# Altium PCB MC0101S_V0.90A.pcbdoc
Units mm, origin at the board's own origin, x right, y up, seen from the top; angles counter-clockwise.
Board outline 73 x 50 mm, 4 copper layers (Top Layer, Mid-Layer 1, Mid-Layer 2, Bottom Layer); 152 components, 91 nets, 419 pads, 252 vias.
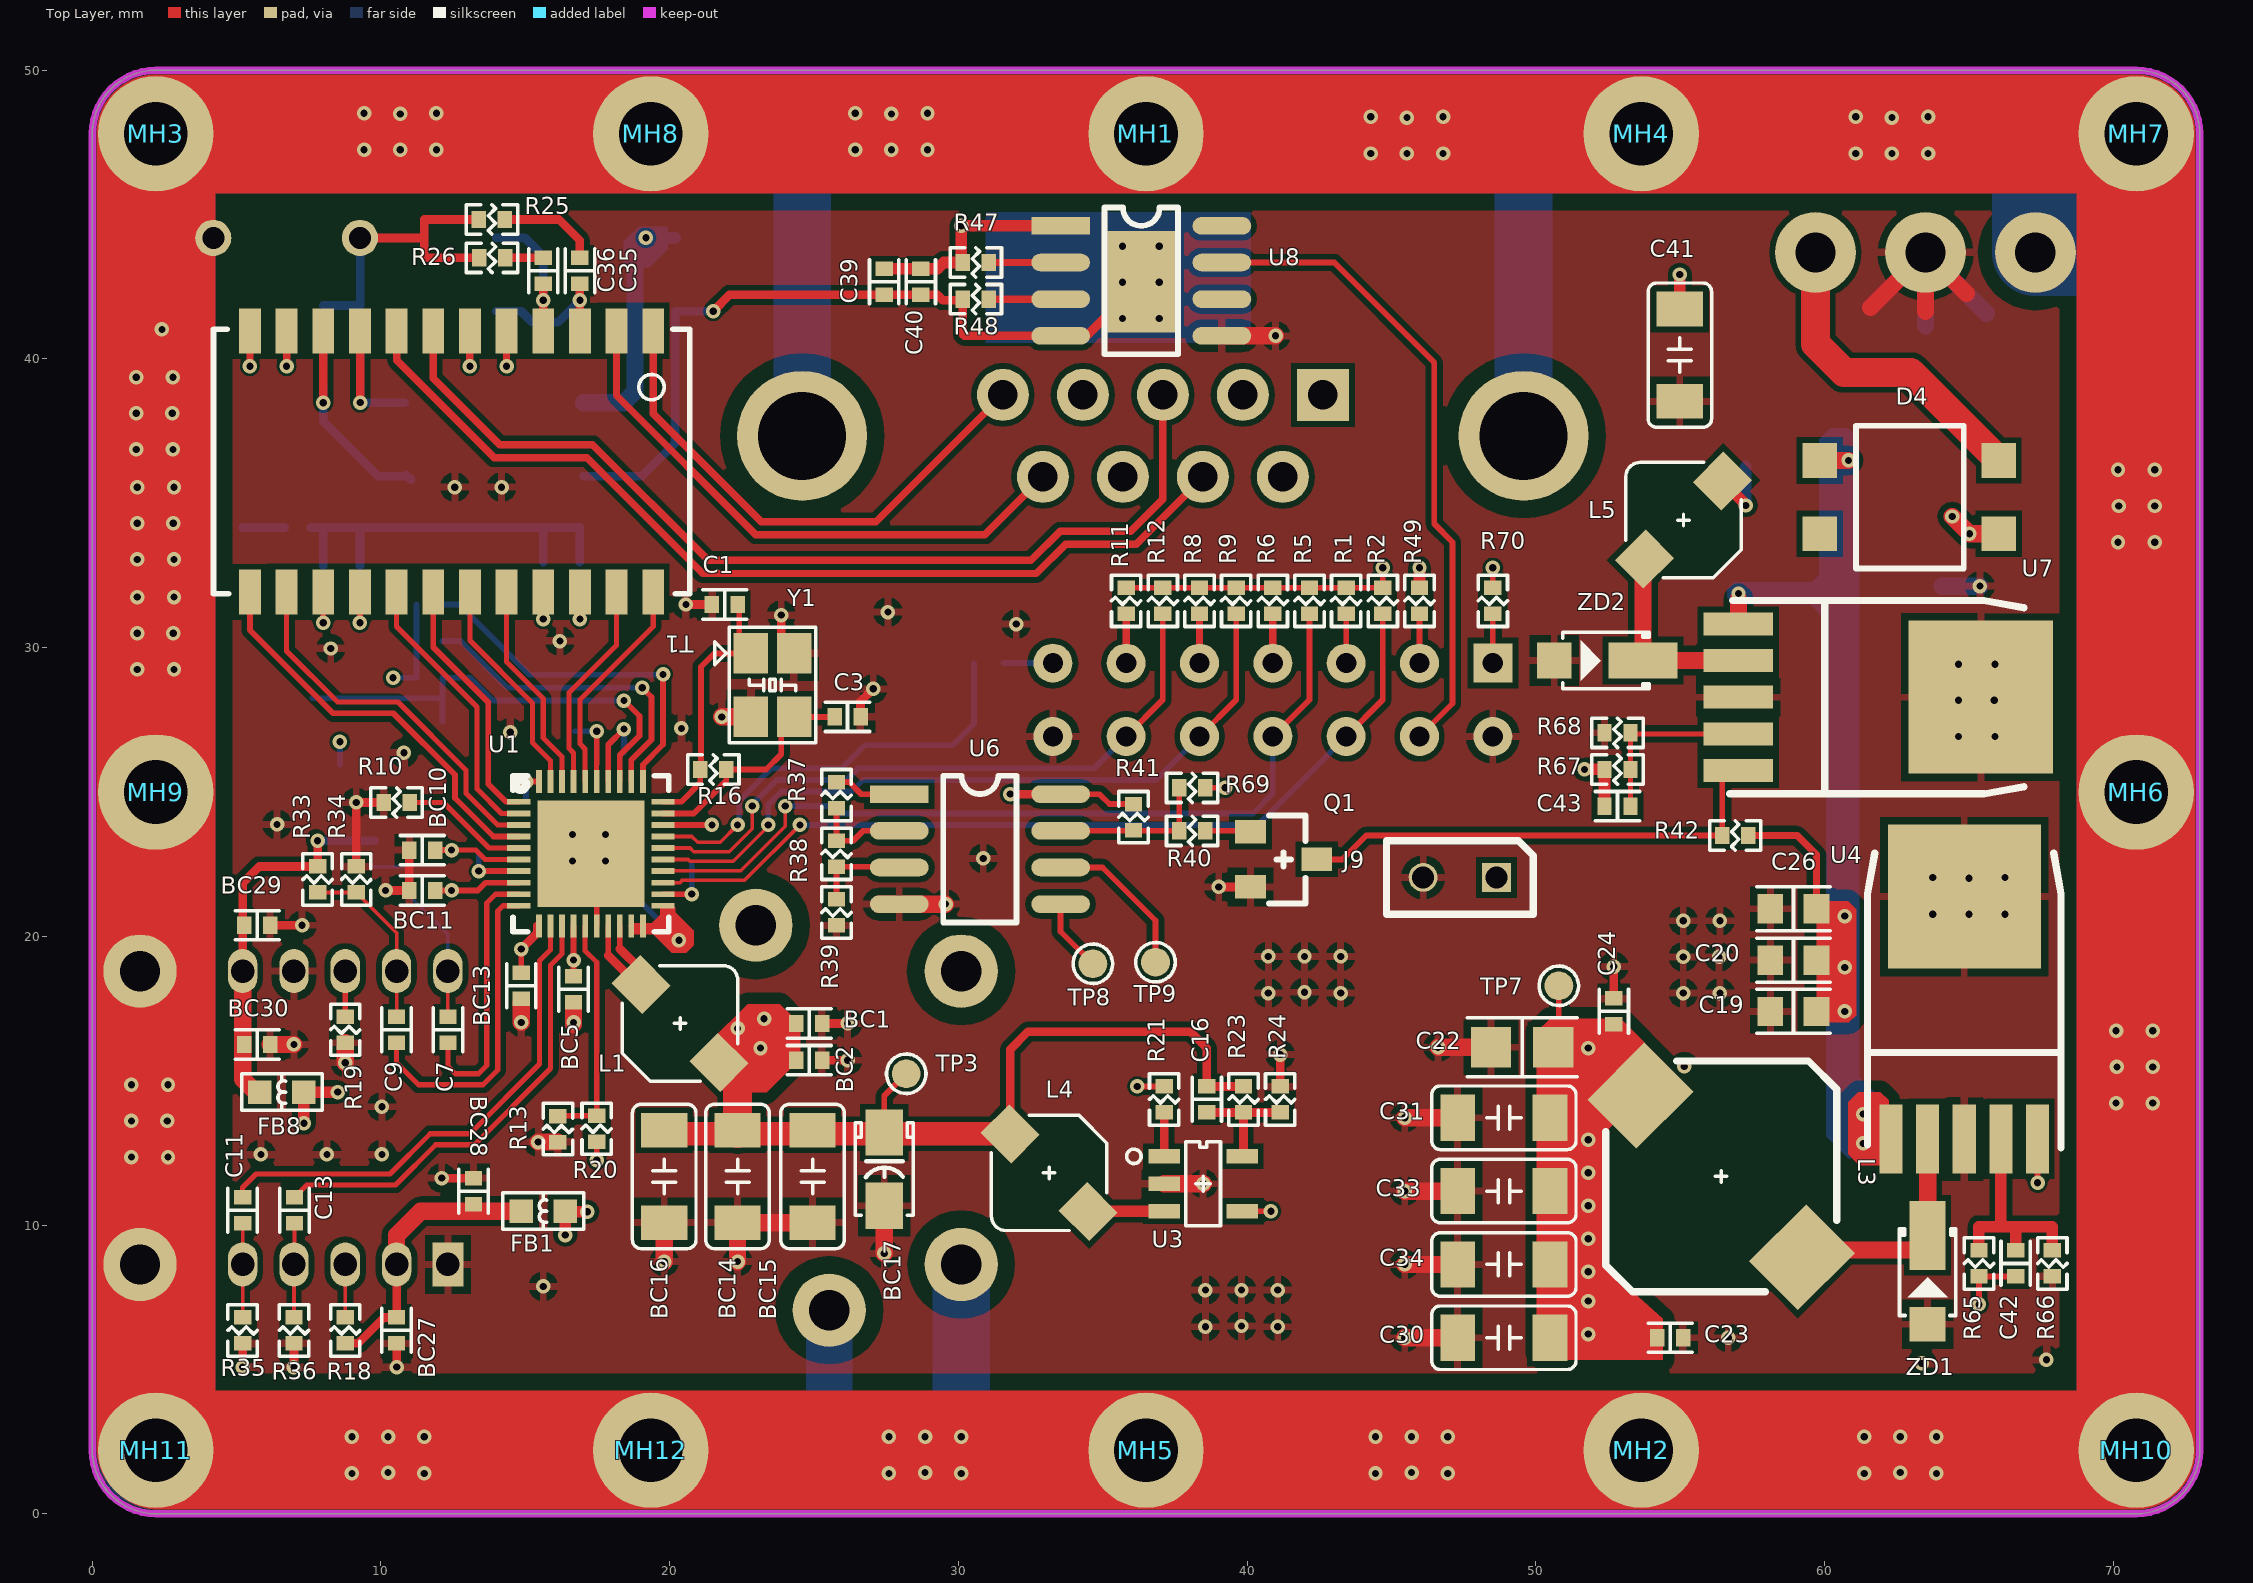
[diagram p0: Top Layer view]
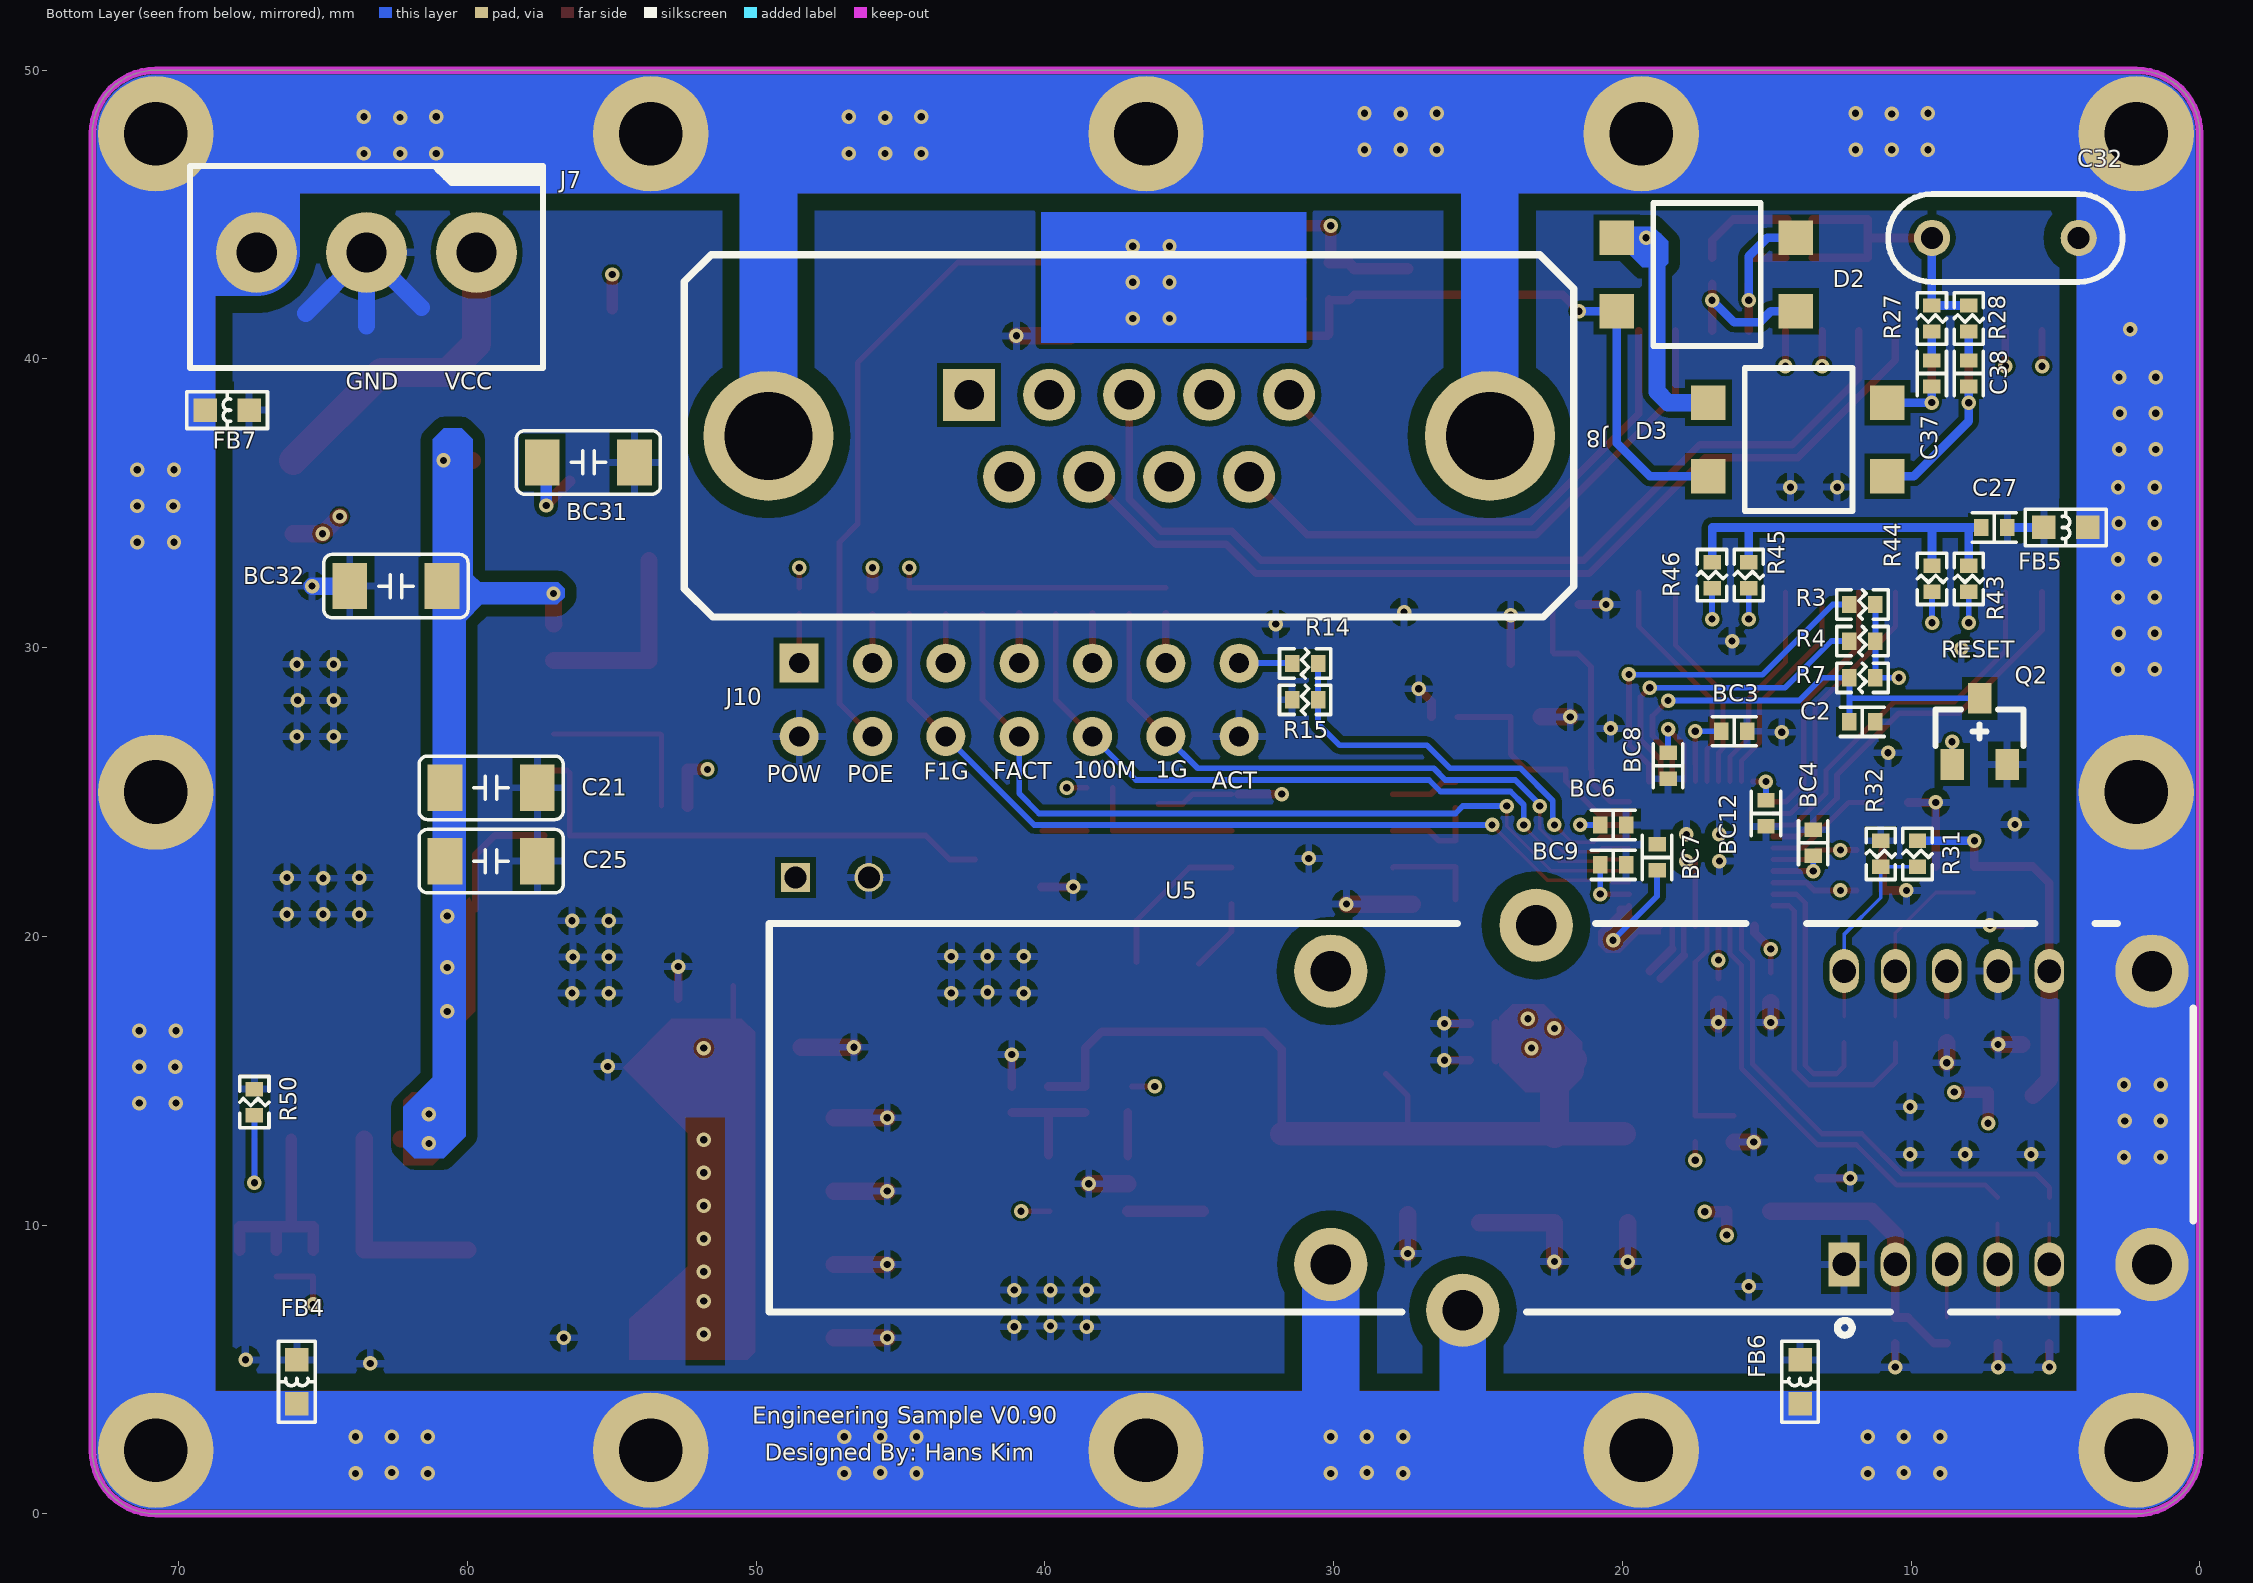
[diagram p1: Bottom Layer view, seen from below]
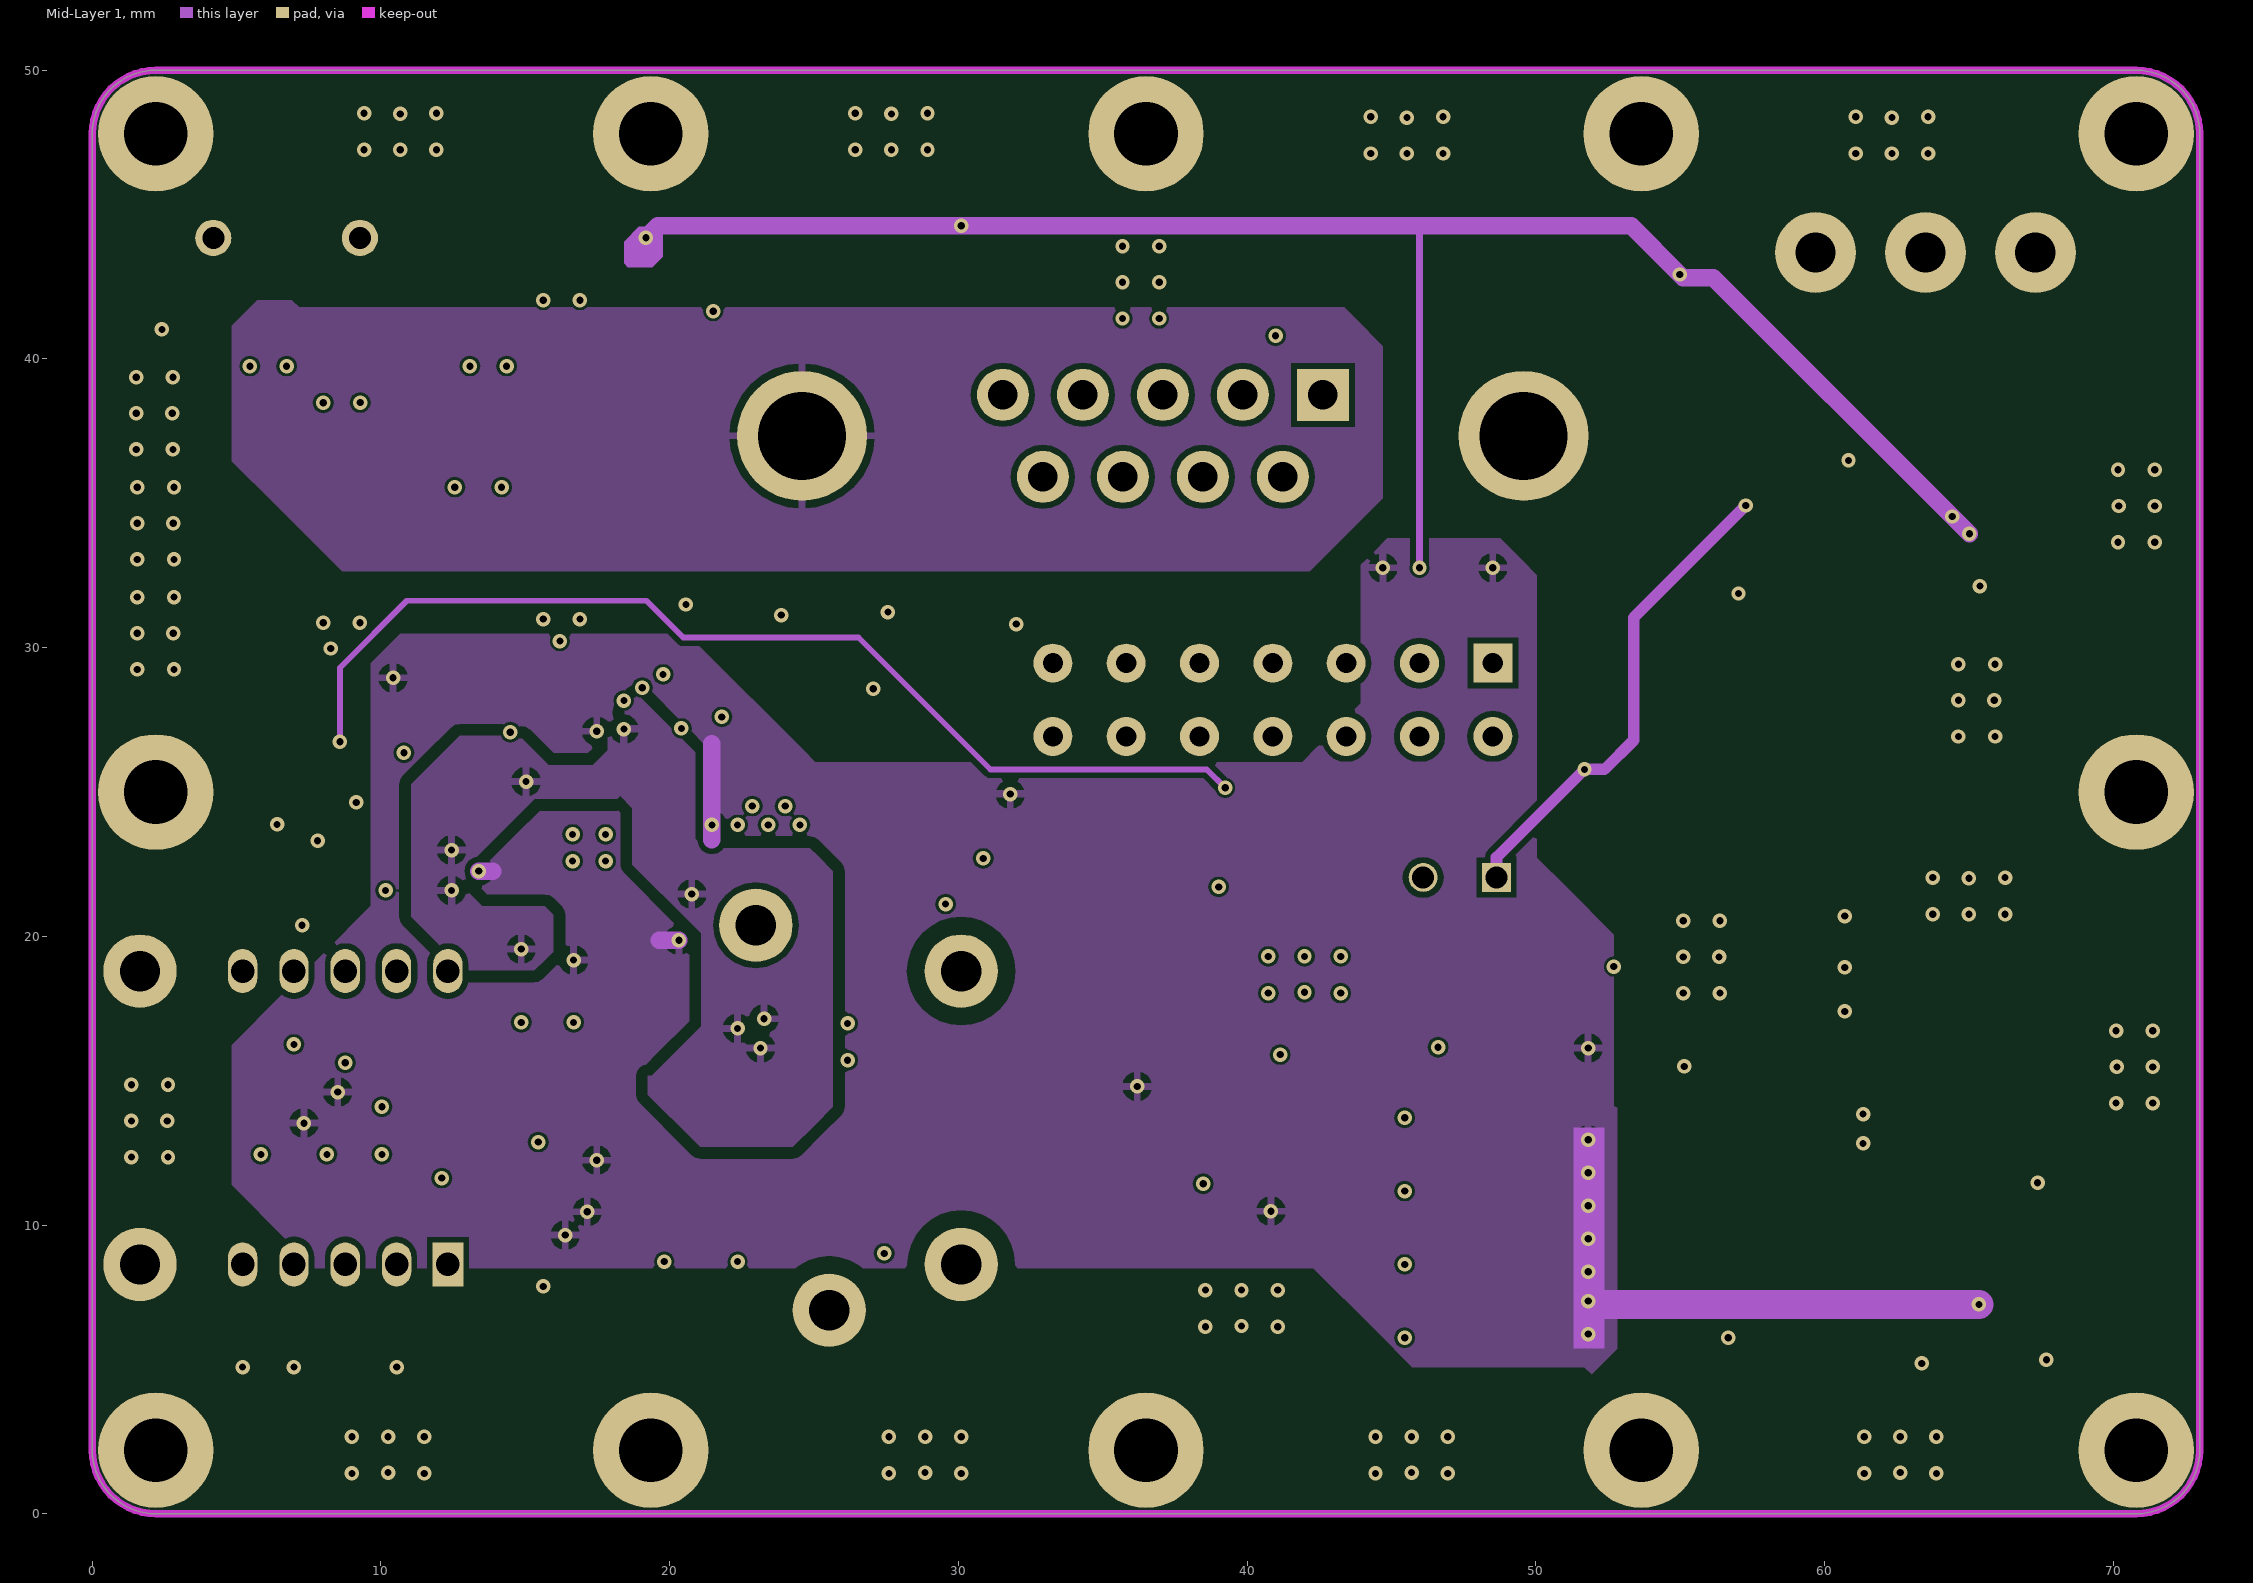
[diagram p2: Mid-Layer 1]
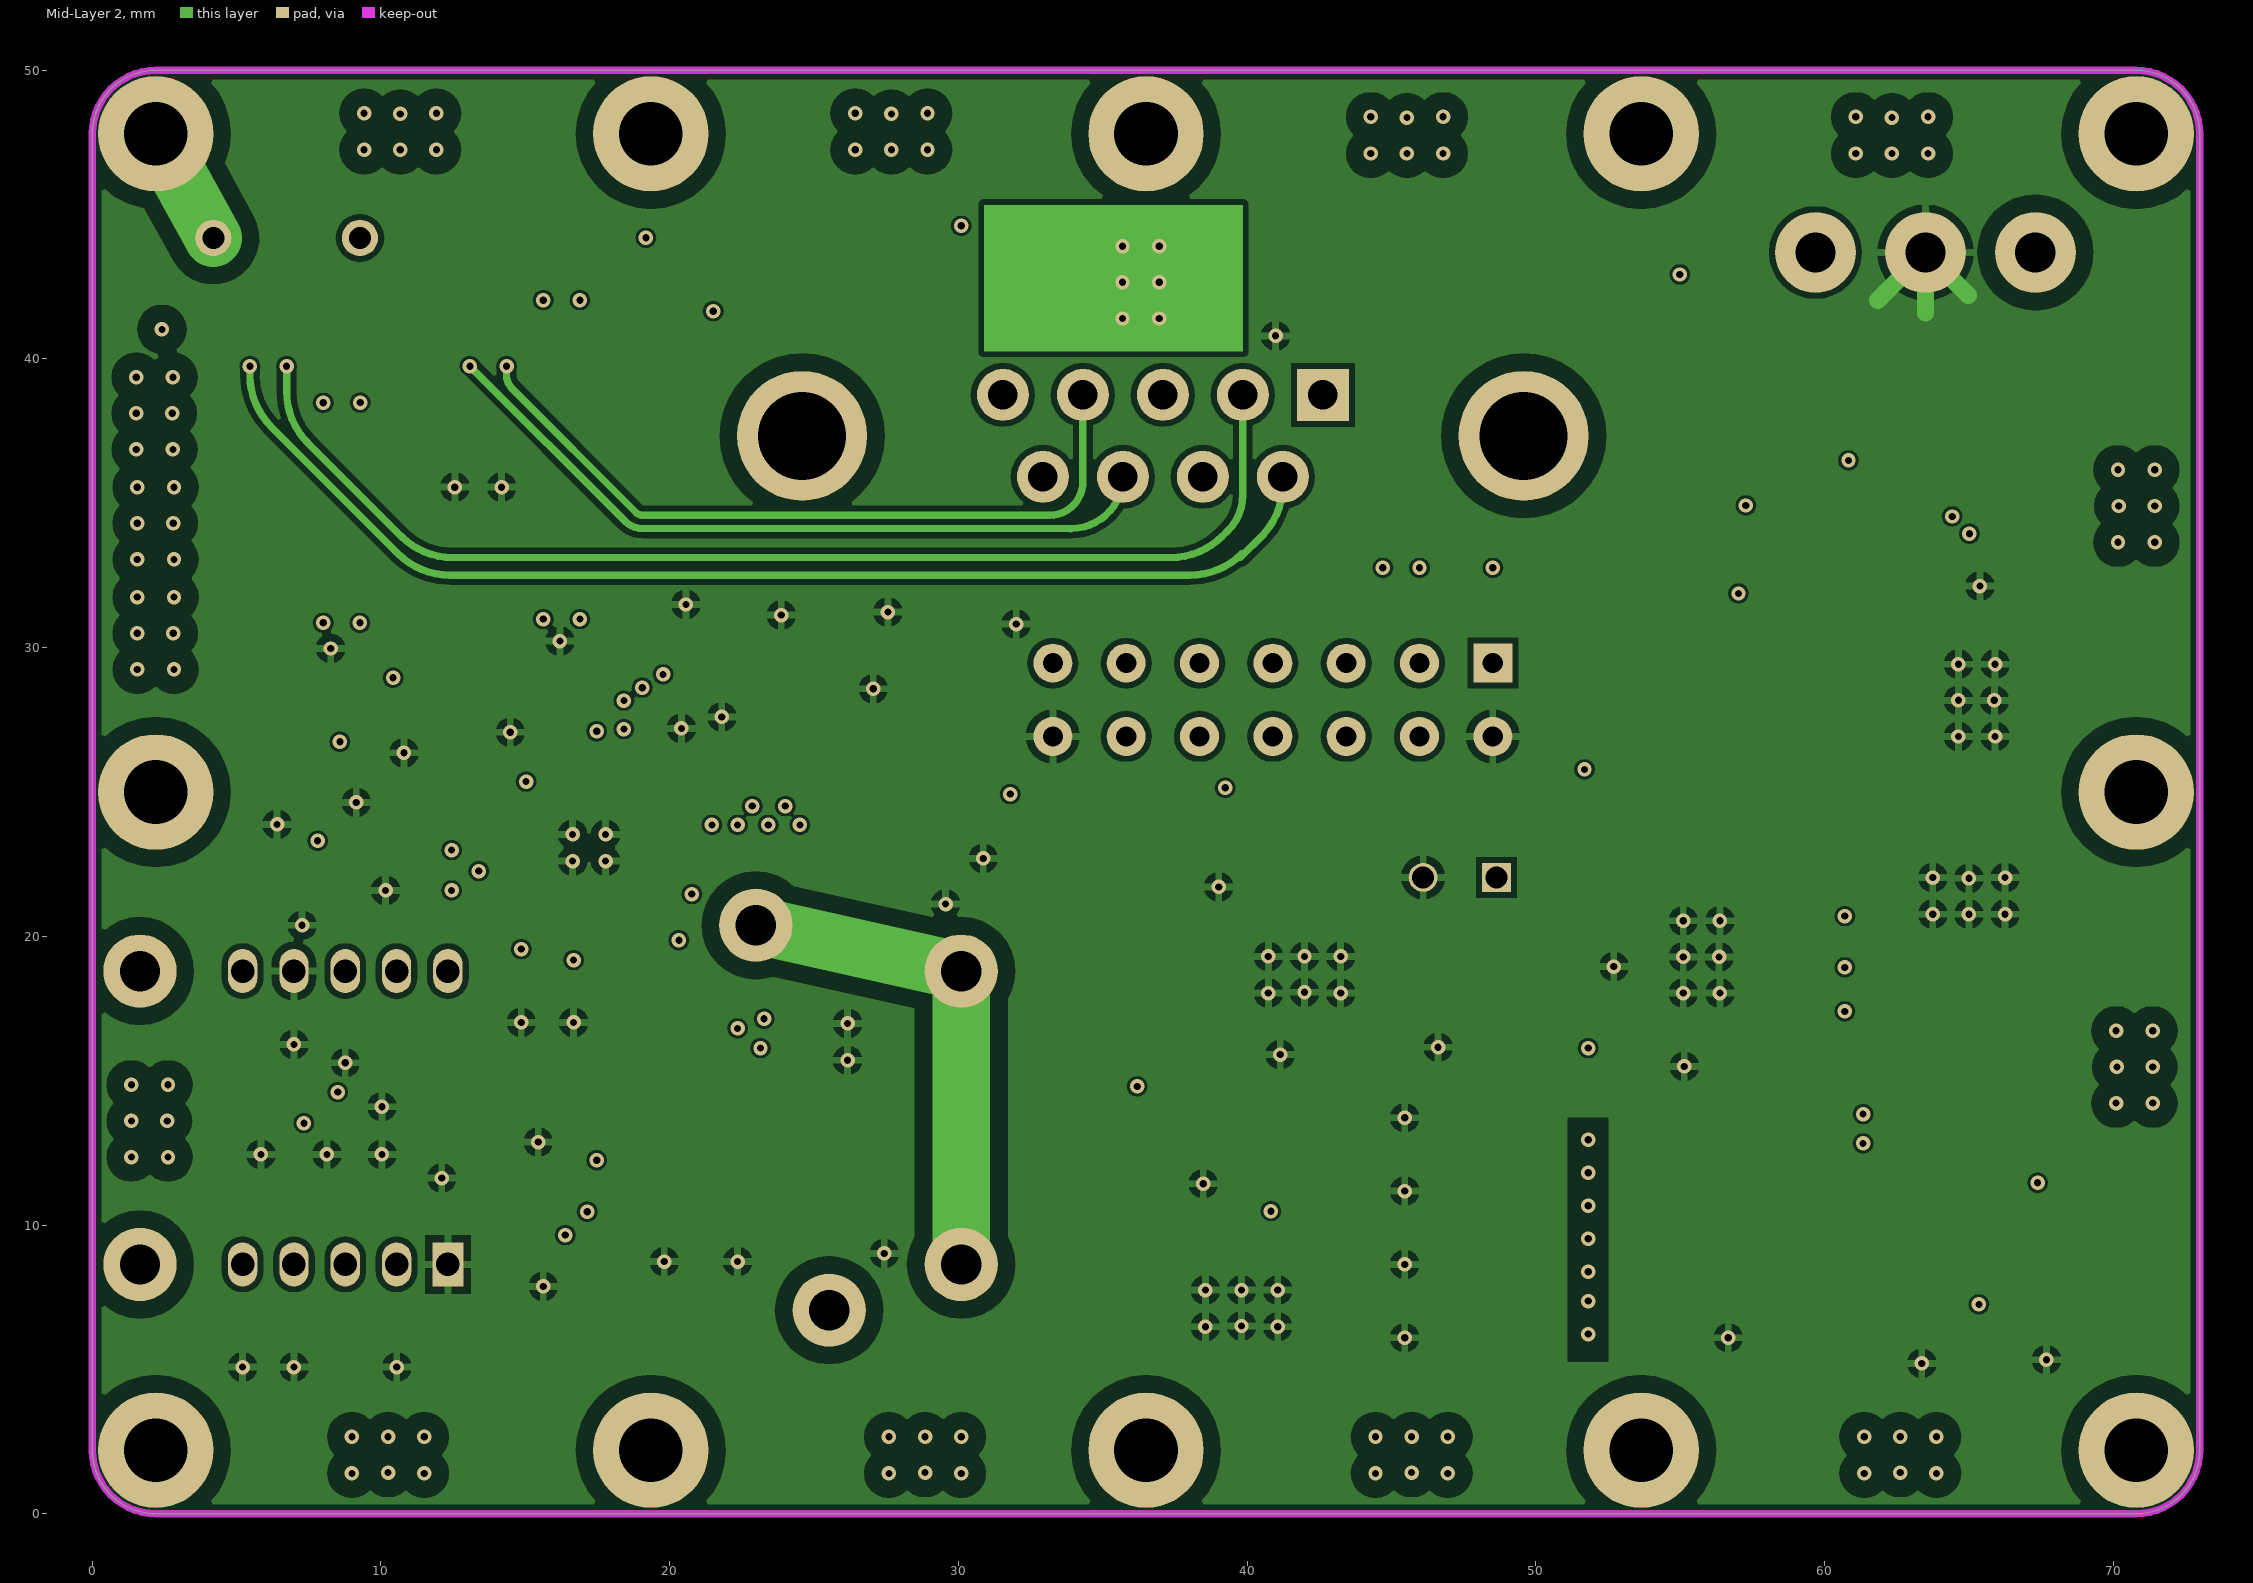
[diagram p3: Mid-Layer 2]

## Layer stack, top to bottom
Top Solder: solder mask 0.0102, Solder Resist, Dk 3.5
Top Layer: signal copper 0.0356
Dielectric1: dielectric 0.32, FR-4, Dk 4.8
Mid-Layer 1: signal copper 0.0356
Dielectric2: dielectric 0.32, FR-4, Dk 4.8
Mid-Layer 2: signal copper 0.0356
Dielectric3: dielectric 0.32, FR-4, Dk 4.8
Bottom Layer: signal copper 0.0356
Bottom Solder: solder mask 0.0102, Solder Resist, Dk 3.5

## Board outline
0,2.2 ccw(c2.2,2.2) 2.2,0 70.8,0 ccw(c70.8,2.2) 73,2.2 73,47.8 ccw(c70.8,47.8) 70.8,50 2.2,50 ccw(c2.2,47.8) 0,47.8

## Design rules (kind name [scope] priority, off if disabled: settings)
Clearance Clearance_5 [InNet('AGND') vs ((InNet('GND') and isRegion)  or InNet('+3.3V'))] p1: gap=0.6
Clearance Clearance_4 [isRegion vs IsRegion] p2: gap=0.4
Clearance Clearance_3 [InNet('AGND') vs (OnLayer('Keep-Out Layer'))] p3: gap=0
Clearance Clearance_2 [InNetClass('ETH') vs InNetClass('ETH')] p4: gap=0.127
Clearance Clearance_1 [isVia] p5: gap=0.1
Clearance [All] p6: gap=0.2
ComponentClearance ComponentClearance_1 [InComponent('FB6') or InComponent('CN2') vs InComponent('U5') or InComponent('J4')] p1: gap=0 collisioncheckmode=3 verticalgap=0 showdistances=FALSE
ComponentClearance [All] p2: gap=0.1 collisioncheckmode=3 verticalgap=0.1 showdistances=FALSE
HoleSize [All] p1: absolutevalues=TRUE maxlimit=5.12 minlimit=0.025 maxpercent=80.000 minpercent=20.000
MinimumSolderMaskSliver MinimumSolderMaskSliver_2 [isVia vs isVia] p1: minsoldermaskwidth=0.1
MinimumSolderMaskSliver MinimumSolderMaskSliver_1 [IsPad vs isPad] p2: minsoldermaskwidth=0.05
MinimumSolderMaskSliver [All] p3: minsoldermaskwidth=0.1
PolygonConnect [All] p1: connectstyle=Relief reliefconductorwidth=0.254 reliefentries=4 polygonreliefangle="90 Angle" airgapwidth=0.254
RoutingVias [All] p1: holewidth=0.25 width=0.5 viastyle="Through Hole" minholewidth=0.25 minwidth=0.5 maxholewidth=0.25 maxwidth=0.5
SilkToSilkClearance [All] p1: silktosilkclearance=0.01
SilkToSolderMaskClearance [IsPad] p1: minsilkscreentomaskgap=0 clearancetoexposedcopper=TRUE
SolderMaskExpansion [All] p1: expansion=0.102
Width Width_2 [InNet('AGND')] p1: maxlimit=5 minlimit=0.254 preferedwidth=2.2
Width Width_1 [InNetClass('ETH')] p2: maxlimit=0.2 minlimit=0.127 preferedwidth=0.178
Width [All] p3: maxlimit=1 minlimit=0.127 preferedwidth=0.2
24 further rules are at their usual default settings.

## Components (designator, comment, footprint, x,y, rotation, side; value= is the part's Value field where it differs from the comment)
BC1 "1uF" CS-1005 24.83,16.983 r0 top
BC2 "0.1uF" CS-1005 24.83,15.713 r0 top
BC3 "0.1uF" CS-1005 16.129,27.105 r180 bottom
BC4 "0.1uF" CS-1005 13.389,23.241 r90 bottom
BC5 "0.1uF" CS-1005 16.672,18.161 r270 top
BC6 "0.1uF" CS-1005 20.32,23.86 r180 bottom
BC7 "0.1uF" CS-1005 18.796,22.733 r90 bottom
BC8 "0.1uF" CS-1005 18.415,25.908 r270 bottom
BC9 "0.1uF" CS-1005 20.32,22.479 r180 bottom
BC10 "0.1uF" CS-1005 11.43,22.987 r180 top
BC11 "0.1uF" CS-1005 11.43,21.59 r180 top
BC12 "0.1uF" CS-1005 15.027,24.257 r270 bottom
BC13 "0.1uF" CS-1005 14.859,18.288 r270 top
BC14 "47uF" CS-3216 22.352,11.684 r270 top
BC15 "47uF" CS-3216 24.95,11.684 r270 top
BC16 "47uF" CS-3216 19.812,11.684 r270 top
BC17 "22uF" CTS-3216 27.432,11.938 r270 top
BC27 "0.1uF" CS-1005 10.541,6.35 r90 top
BC28 "1uF" CS-1005 13.208,11.176 r270 top
BC29 "0.1uF" CS-1005 5.715,20.383 r180 top
BC30 "1uF" CS-1005 5.715,16.256 r180 top
BC31 "1uF" CS-3216 55.818,36.417 r180 bottom
BC32 "4.7uF/100V" CS-3216 62.484,32.131 r0 bottom
C1 "12pF" CS-1005 21.911,31.496 r180 top
C2 "0.1uF" CS-1005 11.684,27.432 r180 bottom
C3 "12pF" CS-1005 26.162,27.602 r0 top
C7 "0.1uF" CS-1005 12.319,16.764 r270 top
C9 "0.1uF" CS-1005 10.541,16.764 r270 top
C11 "0.1uF" CS-1005 5.207,10.515 r90 top
C13 "0.1uF" CS-1005 7.005,10.515 r90 top
C16 "22pF" CS-1005 38.608,14.351 r90 top
C19 "0.1uF" CS-1608 58.928,17.399 r180 top
C20 "1nF" CS-1608 58.928,19.177 r180 top
C21 "4.7uF/100V" CS-3216 59.182,25.146 r180 bottom
C22 "10uF" CS-2012 49.53,16.158 r180 top
C23 "0.1uF" CS-1005 54.653,6.096 r0 top
C24 "10nF" CS-1005 52.705,17.399 r90 top
C25 "4.7uF/100V" CS-3216 59.182,22.604 r180 bottom
C26 "0.1uF" CS-1608 58.928,20.955 r180 top
C27 "0.1uF" CS-1005 7.112,34.163 r0 bottom
C30 "22uF" CS-3216 48.895,6.096 r180 top
C31 "22uF" CS-3216 48.895,13.716 r180 top
C32 "1nF/2KV" CIP-5.0 6.731,44.192 r180 bottom
C33 "22uF" CS-3216 48.895,11.176 r180 top
C34 "22uF" CS-3216 48.895,8.636 r180 top
C35 "10nF" CS-1005 16.891,43.053 r270 top
C36 "10nF" CS-1005 15.621,43.053 r270 top
C37 "10nF" CS-1005 9.281,39.497 r270 bottom
C38 "10nF" CS-1005 8.001,39.497 r270 bottom
C39 "10nF" CS-1005 27.432,42.672 r90 top
C40 "0.1uF" CS-1005 28.702,42.672 r90 top
C41 "4.7uF/100V" CS-3216 54.991,40.132 r270 top
C42 "33nF" CS-1005 66.623,8.67 r90 top
C43 "33nF" CS-1005 52.832,24.511 r0 top
D2 "MB6S" MB2S 17.164,42.926 r90 bottom
D3 "MB6S" MB2S 13.991,37.211 r90 bottom
D4 "MB6S" MB2S 62.865,35.214 r90 top
FB1 "600" LS-1608 15.621,10.483 r180 top
FB4 "600" LS-1608 65.913,4.572 r270 bottom
FB5 "600" LS-1608 4.641,34.163 r180 bottom
FB6 "600" LS-1608 13.843,4.572 r270 bottom
FB7 "600" LS-1608 68.326,38.227 r0 bottom
FB8 "600" LS-1608 6.569,14.605 r180 top
J7 "KF2EDGR-3.81-3P" KF2EDGV-3.81-3P 59.69,43.688 r0 bottom
J8 "D-SUB_ST_PCB-MALE" D-SUB_ST_PCB-MALE 37.084,37.338 r180 bottom
J9 "CON 2P" Header_2.54_2p 48.641,22.041 r180 top
J10 "CON 14P DUAL" HEADER_2.54_7X2 40.894,28.194 r0 bottom
L1 "2.2uH//NI" CDRH3D16NP 20.359,16.983 r270 top
L3 "CDRH8D38NP-101NC" CDRH8D38 56.426,11.684 r90 top
L4 "2.2uH" CDRH3D16NP 33.147,11.811 r90 top
L5 "CDRH3D16NP-4R7N" CDRH3D16NP 55.118,34.417 r0 top
MH1 "4.04pi" VA-2.2 36.5,47.8 r0 top locked
MH2 "4.04pi" VA-2.2 53.65,2.2 r0 top locked
MH3 "4.04pi" VA-2.2 2.2,47.8 r0 top locked
MH4 "4.04pi" VA-2.2 53.65,47.8 r0 top locked
MH5 "4.04pi" VA-2.2 36.5,2.2 r0 top locked
MH6 "4.04pi" VA-2.2 70.8,25 r0 top locked
MH7 "4.04pi" VA-2.2 70.8,47.8 r0 top locked
MH8 "4.04pi" VA-2.2 19.35,47.8 r0 top locked
MH9 "4.04pi" VA-2.2 2.2,25 r0 top locked
MH10 "4.04pi" VA-2.2 70.8,2.2 r0 top locked
MH11 "4.04pi" VA-2.2 2.2,2.2 r0 top locked
MH12 "4.04pi" VA-2.2 19.35,2.2 r0 top locked
Q1 "MMBT6427/SOT-23" SOT-23 41.275,22.66 r0 top
Q2 "MMBT6427/SOT-23" SOT-23 7.62,27.105 r90 bottom
R1 "470" RS-1005 43.434,31.623 r270 top
R2 "4.7K" RS-1005 44.704,31.623 r270 top
R3 "4.7K" RS-1005 11.684,31.496 r0 bottom
R4 "4.7K" RS-1005 11.684,30.226 r0 bottom
R5 "4.7K" RS-1005 42.164,31.623 r270 top
R6 "470" RS-1005 40.894,31.623 r270 top
R7 "4.7K" RS-1005 11.684,28.956 r0 bottom
R8 "470" RS-1005 38.354,31.623 r270 top
R9 "4.7K" RS-1005 39.624,31.623 r270 top
R10 "2.5K_F" RS-1005 10.541,24.638 r0 top
R11 "470" RS-1005 35.814,31.623 r270 top
R12 "4.7K" RS-1005 37.084,31.623 r270 top
R13 "4.7K//NI" RS-1005 17.472,13.335 r90 top
R14 "470" RS-1005 30.988,29.452 r0 bottom
R15 "4.7K" RS-1005 30.988,28.194 r0 bottom
R16 "10M" RS-1005 21.513,25.781 r0 top
R18 "10K" RS-1005 8.763,6.35 r270 top
R19 "1K" RS-1005 8.763,16.764 r90 top
R20 "0" RS-1005 16.129,13.323 r270 top
R21 "1K" RS-1005 37.131,14.351 r270 top
R23 "40.2K" RS-1005 39.878,14.351 r270 top
R24 "45.3" RS-1005 41.148,14.351 r90 top
R25 "75" RS-1005 13.843,44.831 r0 top
R26 "75" RS-1005 13.848,43.503 r0 top
R27 "75" RS-1005 9.281,41.402 r270 bottom
R28 "75" RS-1005 8.001,41.402 r270 bottom
R31 "10K" RS-1005 9.779,22.86 r90 bottom
R32 "10K" RS-1005 11.049,22.86 r270 bottom
R33 "10K" RS-1005 7.805,21.971 r90 top
R34 "10K" RS-1005 9.144,21.971 r270 top
R35 "10K" RS-1005 5.207,6.35 r90 top
R36 "10K" RS-1005 6.985,6.35 r90 top
R37 "10K" RS-1005 25.781,24.892 r270 top
R38 "8.56" RS-1005 25.781,22.86 r270 top
R39 "8.56K" RS-1005 25.781,20.828 r270 top
R40 "1K" RS-1005 38.1,23.656 r0 top
R41 "10K" RS-1005 36.068,24.13 r270 top
R42 "100K" RS-1005 56.91,23.495 r180 top
R43 "75" RS-1005 8.001,32.385 r270 bottom
R44 "75" RS-1005 9.271,32.385 r270 bottom
R45 "75" RS-1005 15.621,32.512 r270 bottom
R46 "75" RS-1005 16.891,32.512 r270 bottom
R47 "24.9" RS-1005 30.607,43.341 r180 top
R48 "63.4" RS-1005 30.607,42.071 r180 top
R49 "4.7K" RS-1005 45.974,31.623 r90 top
R50 "0" RS-1005 67.385,14.258 r270 bottom
R65 "10K_1%" RS-1005 65.353,8.67 r270 top
R66 "6K_1%" RS-1005 67.893,8.67 r90 top
R67 "10K_1%" RS-1005 52.832,25.781 r180 top
R68 "1.5K_1%" RS-1005 52.832,27.051 r0 top
R69 "1K" RS-1005 38.1,25.146 r0 top
R70 "4.7K" RS-1005 48.514,31.623 r90 top
T1 "HY2424S-LF" HY2424S-LF 12.446,36.449 r180 top
TP3 "1V" TP-SMD(1.0) 28.194,15.24 r0 top
TP7 "TP" TP-SMD(1.0) 50.8,18.288 r90 top
TP8 "VTEMP" TP-SMD(1.0) 34.659,19.05 r90 top
TP9 "TRIG_H" TP-SMD(1.0) 36.83,19.104 r90 top
U1 "RTL8213B" QFN-40_5X5 17.272,22.86 r270 top
U3 "AME5253-AEVADJ" SOT-23-5P 38.481,11.43 r270 top
U4 "XL7015E1" TO252-5L 64.845,17.179 r0 top
U5 "FTLF1319F1MTL" FTLF1319F1MTL 12.319,13.716 r180 bottom
U6 "LM56" SOIC-8 30.734,22.987 r270 top
U7 "XL7015E1" TO252-5L 61.214,28.284 r270 top
U8 "TPS2379DDAR" SOIC-8E 36.322,42.672 r270 top
Y1 "25MHz-S20P-SX32" SX-32 23.563,28.702 r90 top
ZD1 "DFLS140" PowerDI123 63.575,8.416 r270 top
ZD2 "DFLS140" PowerDI123 52.489,29.554 r180 top

## Footprints (in the part's own frame and the unit in brackets; to place one, negate y for a bottom-side part, rotate by r counter-clockwise, add the part's x,y. Pads: shape width x height; smd on the part's side, far side on the other; paste and mask are expansions set on the pad)
CDRH3D16NP [mm]
  rect 1.5x1.4 smd rot 45: 1(1.35,1.35) 2(-1.35,-1.35)
  Top Layer pour cut-out: -1.973,1.727 -2,-0.7 -0.7,-2 1.025,-2 2,-1.025 2,0.7 0.7,2 -1.7,2
  silkscreen extent -2,-2 2,2
CDRH8D38 [mm]
  rect 2.4x2.8 smd rot 45: 1(-2.8,-2.8) 2(2.8,2.8)
  Top Layer pour cut-out: -3.075,4 -4,3.075 -4,-2.3 -2.3,-4 3.025,-4 4,-3.025 4,2.025 2.025,4
  silkscreen extent -4,-4 4,4
CIP-5.0 [mil]
  round 49.37 hole 30: 1(-100,0) 2(100,0)
  silkscreen extent -160,-60 160,60
CS-1005 [mm]
  rect 0.5x0.6 smd: 1(-0.45,0) 2(0.45,0)
  silkscreen extent -0.76,-0.51 0.76,0.51
CS-1608 [mil]
  rect 35x40 smd: 1(-31.5,0) 2(31.5,0)
  silkscreen extent -50,-30 50,30
CS-2012 [mil]
  rect 55x55 smd: 1(-42.5,0) 2(42.5,0)
  silkscreen extent -75,-40 75,40
CS-3216 [mm]
  rect 1.2x1.6 smd: 1(-1.6,0) 2(1.6,0)
  silkscreen extent -2.5,-1.1 2.5,1.1
CTS-3216 [mil]
  rect 63x51 smd: 1(-50,0) 2(50,0)
  silkscreen extent -63,-39 63,39
D-SUB_ST_PCB-MALE [mm]
  rect 1.8x1.8 hole 1.02: 1(-5.54,1.42)
  round 1.8 hole 1.02: 2(-2.77,1.42) 3(0,1.42) 4(2.77,1.42) 5(5.54,1.42) 6(-4.155,-1.42) 7(-1.385,-1.42) 8(1.385,-1.42) 9(4.155,-1.42)
  round 4.5 hole 3.05: M1(-12.495,0) M2(12.495,0)
  silkscreen extent -15.41,-6.27 15.41,6.27
FTLF1319F1MTL [mil]
  rect 42x60 hole 32 paste+0 mask+1.97: 1(0,-200)
  oval 40x60 hole 32 paste+0 mask+1.97: 2(70,-200) 3(140,-200) 4(210,-200) 5(280,-200) 6(280,200) 7(210,200) 8(140,200) 9(70,200) 10(0,200)
  round 100 hole 55 paste+0 mask+1.97: MS1(-700,-200) MS2(-700,200) MS3(-520,-262.5) MS4(-420,262.5) MS5(420,-200) MS6(420,200)
  silkscreen extent -1466,-296 476,265
Header_2.54_2p [mm]
  rect 1x1 hole 0.762: 1(0,0)
  round 1 hole 0.762: 2(2.54,0)
  silkscreen extent -1.27,-1.27 3.81,1.27
HEADER_2.54_7X2 [mm]
  rect 1.35x1.35 hole 0.7: 1(7.62,-1.27)
  round 1.35 hole 0.7: 2(7.62,1.27) 3(5.08,-1.27) 4(5.08,1.27) 5(2.54,-1.27) 6(2.54,1.27) 7(0,-1.27) 8(0,1.27) 9(-2.54,-1.27) 10(-2.54,1.27) 11(-5.08,-1.27) 12(-5.08,1.27) 13(-7.62,-1.27) 14(-7.62,1.27)
HY2424S-LF [mm]
  rect 0.76x1.56 smd: 1(-6.985,-4.525) 2(-5.715,-4.525) 3(-4.445,-4.525) 4(-3.175,-4.525) 5(-1.905,-4.525) 6(-0.635,-4.525) 7(0.635,-4.525) 8(1.905,-4.525) 9(3.175,-4.525) 10(4.445,-4.525) 11(5.715,-4.525) 12(6.985,-4.525) 13(6.985,4.525) 14(5.715,4.525) 15(4.445,4.525) 16(3.175,4.525) 17(1.905,4.525) 18(0.635,4.525) 19(-0.635,4.525) 20(-1.905,4.525) 21(-3.175,4.525) 22(-4.445,4.525) 23(-5.715,4.525) 24(-6.985,4.525)
  silkscreen extent -8.25,-4.58 8.25,4.58
KF2EDGV-3.81-3P [mm]
  round 2.8 hole 1.4: 1(0,0) 2(3.81,0) 3(7.62,0)
  silkscreen extent -2.3,-3 9.92,4
LS-1608 [mil]
  rect 32x32 smd: 1(-30,0) 2(30,0)
  silkscreen extent -55,-25 55,25
MB2S [mm]
  rect 1.2x1.2 smd: 1(-1.269,-3.173) 2(1.271,-3.173) 3(1.271,3.027) 4(-1.269,3.027)
  silkscreen extent -2.47,-1.96 2.47,1.77
PowerDI123 [mm]
  rect 1.2x1.25 smd: 1(1.85,0)
  rect 2.4x1.25 smd: 2(-1.225,0)
  silkscreen extent -1.45,-0.97 1.55,0.98
QFN-40_5X5 [mm]
  rect 0.2x0.8 smd paste-100 mask+0.05: 1(-1.8,-2.499) 2(-1.4,-2.499) 3(-1,-2.499) 4(-0.6,-2.499) 7(0.6,-2.499) 8(1,-2.499) 9(1.4,-2.499) 10(1.8,-2.499) 21(1.8,2.499) 22(1.4,2.499) 23(1,2.499) 24(0.6,2.499) 27(-0.6,2.499) 28(-1,2.499) 29(-1.4,2.499) 30(-1.8,2.499)
  rect 0.199x0.8 smd paste-100 mask+0.05: 5(-0.2,-2.499) 6(0.2,-2.499) 25(0.2,2.499) 26(-0.2,2.499)
  rect 0.8x0.2 smd paste-100 mask+0.05: 11(2.499,-1.8) 12(2.499,-1.4) 13(2.499,-1) 14(2.499,-0.6) 17(2.499,0.6) 18(2.499,1) 19(2.499,1.4) 20(2.499,1.8) 31(-2.499,1.8) 32(-2.499,1.4) 33(-2.499,1) 34(-2.499,0.6) 37(-2.499,-0.6) 38(-2.499,-1) 39(-2.499,-1.4) 40(-2.499,-1.8)
  rect 0.8x0.199 smd paste-100 mask+0.05: 15(2.499,-0.2) 16(2.499,0.2) 35(-2.499,0.2) 36(-2.499,-0.2)
  rect 3.7x3.7 smd paste-100 mask+0.05: PAD(0,0)
  silkscreen extent -2.7,-2.7 2.7,2.7
RS-1005 [mm]
  rect 0.5x0.6 smd: 1(-0.45,0) 2(0.45,0)
  silkscreen extent -0.89,-0.51 0.89,0.51
SOIC-8 [mil]
  rect 24x80 smd: 1(-76.34,-109.45)
  oval 24x80 smd: 2(-26.34,-109.45) 3(23.66,-109.45) 4(73.66,-109.45) 5(73.66,110.55) 6(23.66,110.55) 7(-26.34,110.55) 8(-76.34,110.55)
  silkscreen extent -101,-49 99,51
SOIC-8E [mil]
  rect 24x80 smd: 1(-76.34,-109.45)
  oval 24x80 smd: 2(-26.34,-109.45) 3(23.66,-109.45) 4(73.66,-109.45) 5(73.66,110.55) 6(23.66,110.55) 7(-26.34,110.55) 8(-76.34,110.55)
  rect 138.19x103.15 smd: 9(0,0)
  silkscreen extent -101,-49 99,51
SOT-23 [mil]
  rect 42x32 smd: 1(-45.45,37.75) 2(-45.45,-37.35) 3(44.85,0.2)
  silkscreen extent -20,-60 30,60
SOT-23-5P [mm]
  rect 0.5x1.1 smd: 1(-0.95,-1.35) 2(0,-1.35) 3(0.95,-1.35) 4(0.95,1.35) 5(-0.95,1.35)
  silkscreen extent -1.45,-2.65 1.45,0.6
SX-32 [mm]
  rect 1.4x1.2 smd: 1(1.1,0.75) 2(-1.1,0.75) 3(-1.1,-0.75) 4(1.1,-0.75)
  silkscreen extent -2,-1.5 2,2
TO252-5L [mm]
  rect 0.8x2.4 smd: 1(-2.54,-4.2) 2(-1.27,-4.2) 3(0,-4.2) 4(1.27,-4.2) 5(2.54,-4.2)
  rect 5.3x5 smd: 6(0,4.2)
  silkscreen extent -3.35,-4.5 3.35,5.7
TP-SMD(1.0) [mm]
  round 1 smd: 1(0,0)
  silkscreen extent -0.68,-0.68 0.68,0.68
VA-2.2 [mm]
  rrect100% 4x4 hole 2.2: 1(0,0)

## Via types
v1: diameter 0.5, hole 0.25, Top Layer to Bottom Layer, tented both sides, 251 vias
v2: diameter 0.5, hole 0.25, Top Layer to Bottom Layer, 1 vias

## Nets (pads, with @x,y where several pads share a name; then routed paths per layer and width w, separated by ;. In a path a pad name is that pad's centre, name@x,y a point inside that pad or via, vN(x,y) a via of type N, cw(c..) or ccw(c..) an arc to the next point about the centre after c; other vN are vias at no path point)
+3.3V: BC3.1 BC4.1 BC5.1 BC6.1 BC7.1 C22.1 C23.1 C24.1 C30.1 C31.1 C33.1 C34.1 C42.1 FB1.1 FB8.1 L3.2 R1.1 R2.1 R3.1 R4.1 R5.1 R6.1 R7.1 R8.1 R9.1 R11.1 R12.1 R13.1 R21.1 R41.1 R65.2 R70.2 TP7.1 U1.7 U1.14 U1.19 U1.20 U1.21 U1.28 U1.35 U3.4 U6.8 | length 59.5
  Top Layer w0.178: U1.35 17.472,25.981
  Top Layer w0.2: v1(13.389,22.26) U1.7 ; BC5.1@16.672,18.542 v1(16.672,19.177) U1.14 ; v1(17.472,12.246) R13.1 ; 17.472,25.981 v1(17.472,27.105) ; U1.19 19.407,20.361 19.771,20.725 U1.21 ; U1.28 v1(21.463,23.86) ; U6.8 34.891,24.926 35.237,24.58 R41.1 ; R11.1 R2.1 v1(44.704,32.766) ; v1(36.195,14.801) R21.1@36.98,14.801 ; U3.4 v1(40.828,10.48) ; R70.2 v1(48.514,32.766) ; C22.1@50.8,16.348 TP7.1 ; v1(65.353,7.25) R65.2 C42.1
  Top Layer w0.3: v1(31.797,24.926) U6.8@33.301,24.926
  Top Layer w0.4: v1(7.331,13.53) FB8.1 v1(8.5,14.605) ; v1(16.383,9.652) FB1.1 ; FB1.1@16.405,10.461 v1(17.145,10.461)
  Mid-Layer 1 w0.6: v1(13.389,22.26) 13.877,22.26 ; 19.637,19.866 v1(20.32,19.866) ; 21.463,23.346 v1(21.463,23.86) 21.463,26.67
  Mid-Layer 1 w1: v1@51.816,7.25 v1(65.353,7.25)
  Bottom Layer w0.2: v1(10.418,28.956) R7.1 R3.1 ; v1@13.297,22.352 v1@13.316,22.333 ; v1(13.389,22.26) BC4.1 ; BC3.1@16.722,27.105 v1(17.472,27.105) ; BC7.1 18.796,21.39 v1(20.32,19.866) ; BC6.1 v1(21.463,23.86)
  other v1: 51.816,6.223 51.816,7.366 51.816,8.382 51.816,9.525 51.816,10.668 51.816,11.811 51.816,12.954 51.816,16.129
AGND: C32.2 FB4.2 FB5.2 FB6.2 FB7.2 J7.3 J8.M1 J8.M2 MH1.1 MH2.1 MH3.1 MH4.1 MH5.1 MH6.1 MH7.1 MH8.1 MH9.1 MH10.1 MH11.1 MH12.1 U5.MS1 U5.MS2 U5.MS3 U5.MS4 U5.MS5 U5.MS6 | length 516.1
  Top Layer w4.12: MH11.1@2.2,2.292 MH9.1 MH3.1 MH8.1 MH1.1 MH4.1 MH7.1 MH6.1 70.8,2.206 MH11.1@2.286,2.206
  Mid-Layer 2 w2: MH3.1 C32.2 ; U5.MS4 U5.MS2 U5.MS1
  Bottom Layer w1.6: 25.527,2.262 U5.MS3
  Bottom Layer w2: J8.M2 24.589,47.571 ; 30.099,2.032 U5.MS1 ; J8.M1 49.579,47.722
  Bottom Layer w3: 67.31,47.8 J7.3 69.168,43.688
  Bottom Layer w4.12: MH11.1 MH9.1 MH3.1 MH8.1 MH1.1 MH4.1 MH7.1 70.8,42.056 MH6.1 MH10.1 MH2.1 MH5.1 MH11.1@2.24,2.2
  other v1: 8.994,1.397 11.499,1.397 27.594,1.397 30.099,1.397 44.449,1.397 46.954,1.397 61.376,1.397 63.881,1.397 10.246,1.424 28.847,1.424 45.701,1.424 62.629,1.424 8.994,2.667 10.246,2.667 11.499,2.667 27.594,2.667 28.847,2.667 30.099,2.667 44.449,2.667 45.701,2.667 46.954,2.667 61.376,2.667 62.629,2.667 63.881,2.667 1.354,12.354 2.624,12.354 1.354,13.607 2.597,13.607 70.104,14.224 71.374,14.224 1.354,14.859 2.624,14.859 70.131,15.476 71.374,15.476 70.104,16.729 71.374,16.729 1.561,29.245 2.831,29.245 1.561,30.498 2.805,30.498 1.561,31.75 2.831,31.75 1.561,33.055 2.831,33.055 70.169,33.655 71.439,33.655 1.561,34.308 2.805,34.308 70.195,34.907 71.439,34.907 1.561,35.56 2.831,35.56 70.169,36.16 71.439,36.16 1.524,36.865 2.794,36.865 1.524,38.118 2.767,38.118 1.524,39.37 2.794,39.37 2.413,41.025 44.286,47.117 45.539,47.117 46.791,47.117 61.087,47.117 62.339,47.117 63.592,47.117 9.417,47.244 10.669,47.244 11.922,47.244 26.427,47.244 27.68,47.244 28.932,47.244 45.539,48.36 62.339,48.36 44.286,48.387 46.791,48.387 61.087,48.387 63.592,48.387 10.669,48.487 27.68,48.487 9.417,48.514 11.922,48.514 26.427,48.514 28.932,48.514
DC9V: BC31.1 C43.1 J9.1 L5.1 R67.2 | length 21.4
  Top Layer w0.4: v1(51.689,25.781) R67.2 C43.1 ; L5.1 57.277,34.958 v1(57.277,34.925)
  Mid-Layer 1 w0.4: J9.1 48.641,22.733 v1(51.689,25.781) 52.381,25.781 53.395,26.796 53.395,31.043 v1(57.277,34.925)
  Bottom Layer w0.4: v1(57.277,34.925) BC31.1@57.277,36.276
DC_CON_IN: D4.2 J7.1 | length 11.2
  Top Layer w1: J7.1 59.69,40.523 60.683,39.531 62.992,39.531 D4.2
DC_IN: BC32.1 C19.1 C20.1 C21.1 C25.1 C26.1 D4.3 R42.1 U4.1 U7.1 | length 12.2
  Top Layer w0.254: R42.1 59.055,23.495 59.728,22.822 C26.1
  Top Layer w0.6: U7.1 57.023,30.833 v1@57.023,31.681 ; D4.3 v1(60.833,36.485) ; v1(61.341,12.827) 61.493,12.979 U4.1
  Bottom Layer w0.6: BC32.1@60.725,31.681 60.833,31.789 v1(60.833,36.485)
  other v1: 61.341,13.843 60.706,17.399 60.706,18.923 60.706,20.701 57.023,31.877
GND: BC1.2 BC2.2 BC3.2 BC4.2 BC5.2 BC6.2 BC7.2 BC8.2 BC9.2 BC10.2 BC11.2 BC12.2 BC13.2 BC14.2 BC15.2 BC16.2 BC17.2 BC27.1 BC28.1 BC29.1 BC30.1 BC31.2 BC32.2 C1.2 C2.2 C3.2 C19.2 C20.2 C21.2 C22.2 C23.2 C24.2 C25.2 C26.2 C27.1 C30.2 C31.2 C33.2 C34.2 C41.2 FB4.1 FB5.1 FB6.1 FB7.1 J7.2 J9.2 J10.2 J10.14 Q1.2 Q2.2 R10.1 R15.2 R19.1 R20.2 R24.2 R32.1 R34.1 R35.1 R36.1 R39.2 R50.1 R66.1 R68.1 U1.16 U1.PAD U3.2 U4.3 U4.6 U5.1 U5.7 U6.4 U7.3 U7.6 U8.5 Y1.2 Y1.4 ZD1.1 ZD2.1 | length 71.3
  Top Layer w0.2: U1.16 U1.PAD@17.472,22.66
  Top Layer w0.3: v1(5.207,5.08) R35.1 ; BC29.1 v1(7.268,20.383) ; v1(6.985,5.08) R36.1 ; R34.1 v1(9.144,24.638) R10.1 ; v1(10.16,21.59) BC11.2 BC10.2 ; BC27.1 v1(10.549,5.08) ; v1(12.105,11.626) BC28.1 ; v1(20.562,31.496) C1.2@21.509,31.496 ; Y1.4@23.864,29.452 v1(23.864,31.127) ; BC2.2 v1@26.162,15.713 ; BC1.2 v1(26.162,16.983) ; C3.2 26.612,28.136 v1(27.051,28.575) ; v1(39.018,21.711) Q1.2 ; R24.2 v1(41.148,15.904) ; C24.2 v1(52.705,18.952)
  Top Layer w0.6: BC30.1 v1(6.985,16.256) ; v1(8.763,15.621) R19.1 ; v1(14.859,17.018) BC13.2@14.859,17.711 ; v1(15.448,12.873) R20.2 ; v1@16.672,16.96 BC5.2@16.672,17.653 ; v1(19.812,8.734) BC16.2 ; v1(21.806,27.602) Y1.2 ; v1(22.352,8.734) BC14.2 BC15.2 ; U6.4@27.269,21.116 U6.4 v1(29.557,21.116) ; v1(27.432,9.017) BC17.2@27.432,10.367 ; U3.2 v1(38.481,11.43) ; U8.5 v1(40.987,40.801) ; v1(45.461,6.096) C30.2 ; v1(45.461,8.636) C34.2 ; v1(45.461,11.176) C33.2 ; v1(45.461,13.716) C31.2 ; v1(46.616,16.158) C22.2 ; 61.595,41.783 J7.2 ; 63.5,41.656 J7.2 ; 64.921,42.267 J7.2
  Mid-Layer 2 w0.6: 61.849,42.037 J7.2 ; 63.5,41.59 J7.2 ; 64.986,42.202 J7.2
  Bottom Layer w0.3: FB5.1@5.207,34.163 C27.1
  Bottom Layer w0.6: 61.595,41.783 J7.2 ; 63.5,41.148 J7.2 ; BC32.2 v2(65.388,32.131) ; 65.605,41.583 J7.2
  other v1: 63.373,5.207 67.691,5.334 56.669,6.096 38.557,6.477 41.061,6.477 39.809,6.504 38.557,7.747 39.809,7.747 41.061,7.747 15.621,7.874 5.842,12.446 8.128,12.446 10.033,12.446 10.033,14.097 55.147,15.494 26.162,15.707 16.672,17.018 40.738,18.034 43.243,18.034 55.109,18.034 56.379,18.034 41.99,18.061 55.109,19.286 56.353,19.286 40.738,19.304 41.99,19.304 43.243,19.304 55.109,20.539 56.379,20.539 63.754,20.767 65.006,20.767 66.259,20.767 65.006,22.01 63.754,22.037 66.259,22.037 16.637,22.606 17.78,22.606 30.861,22.7 16.637,23.53 17.78,23.53 6.401,23.876 10.796,26.358 64.643,26.923 65.913,26.923 14.478,27.07 20.406,27.204 64.643,28.175 65.886,28.175 64.643,29.427 65.913,29.427 8.258,29.972 16.197,30.226 32.004,30.816 27.559,31.231 12.559,35.56 14.179,35.56
N01813: R10.2 U1.5 | length 4.4
  Top Layer w0.178: R10.2 12.166,24.638 13.744,23.06 U1.5
N01857: R13.2 R20.1 U1.15 | length 9.2
  Top Layer w0.18: R20.1 16.14,13.785 R13.2 17.472,19.104 17.072,19.504 U1.15 ; R20.1@16.383,13.773 R13.2@17.472,13.773
N02024: L1.2 U1.17 U1.18 | length 4
  Top Layer w0.2: 17.872,19.339 U1.17 ; 18.272,19.574 U1.18
  Top Layer w0.3: 17.872,19.339 L1.2@18.669,18.542 ; 18.272,19.574 L1.2@19.05,18.796
N120941: L3.1 U4.2 ZD1.2 | length 7.4
  Top Layer w0.6: L3.1@59.982,9.133 63.575,9.133 U4.2
N139497: R46.2 T1.22 | length 2
  Top Layer w0.2: v1(16.891,30.988) T1.22
  Bottom Layer w0.2: v1(16.891,30.988) R46.2
N139525: R45.2 T1.21 | length 2
  Top Layer w0.2: v1(15.621,30.988) T1.21
  Bottom Layer w0.2: v1(15.621,30.988) R45.2
N139557: R44.2 T1.16 | length 2.1
  Top Layer w0.2: v1(9.271,30.861) T1.16
  Bottom Layer w0.2: v1(9.271,30.861) R44.2
N139593: R43.2 T1.15 | length 2.1
  Top Layer w0.2: v1(8.001,30.861) T1.15
  Bottom Layer w0.2: v1(8.001,30.861) R43.2
N140278: J8.5 T1.1 | length 18.4
  Top Layer w0.254: T1.1 19.431,38.107 23.175,34.363 27.149,34.363 J8.5
N140362: J8.9 T1.2 | length 19.8
  Top Layer w0.254: T1.2 18.161,38.735 22.987,33.909 30.92,33.909 J8.9
N140374: J8.4 T1.5 | length 27.3
  Top Layer w0.254: v1(14.351,39.751) T1.5
  Mid-Layer 2 w0.254: v1(14.351,39.751) 14.351,39.419 ccw(c14.96,39.419) 14.529,38.989 18.834,34.684 ccw(c19.078,34.928) 19.078,34.583 33.147,34.583 ccw(c33.147,35.75) 33.438,34.62 ccw(c33.147,35.75) 34.277,35.459 ccw(c33.147,35.75) 34.314,35.75 J8.4
N140386: J8.8 T1.6 | length 27.2
  Top Layer w0.254: v1(13.081,39.751) T1.6
  Mid-Layer 2 w0.254: v1(13.081,39.751) 18.458,34.374 ccw(c19.05,34.967) 19.05,34.129 33.91,34.129 ccw(c33.91,35.918) J8.8 ; 33.897,34.12 33.901,34.12
N140399: J8.3 T1.7 | length 34
  Top Layer w0.254: T1.7 11.811,39.328 14.109,37.03 17.326,37.03 21.333,33.023 32.515,33.023 33.528,34.036 35.976,34.036 37.084,35.144 J8.3
N140459: J8.7 T1.8 | length 33.4
  Top Layer w0.254: T1.8 10.541,39.956 13.921,36.576 17.138,36.576 21.145,32.569 32.703,32.569 33.716,33.582 36.165,33.582 38.469,35.886 J8.7
N140476: J8.2 T1.11 | length 42.7
  Top Layer w0.254: v1(6.731,39.751) T1.11
  Mid-Layer 2 w0.254: v1(6.731,39.751) 6.731,38.875 ccw(c9.271,38.875) 7.475,37.079 10.687,33.867 ccw(c12.483,35.663) 12.483,33.123 37.353,33.123 ; 37.423,33.123 37.353,33.123 ; J8.2 39.854,35.282 cw(c38.139,35.282) 39.352,34.069 39.149,33.867 cw(c37.353,35.663) 37.353,33.123
N140488: J8.6 T1.12 | length 42.7
  Top Layer w0.254: v1@5.461,39.727 v1(5.461,39.751) T1.12
  Mid-Layer 2 w0.254: v1(5.461,39.751) 5.461,39.438 ccw(c8.001,39.438) 6.205,37.642 10.591,33.256 ccw(c12.387,35.052) 12.387,32.512 38.026,32.512 ccw(c38.026,35.052) 39.822,33.256 ; 39.775,33.129 40.574,33.927 ccw(c38.699,35.641) 41.239,35.641 J8.6
N140824: C32.1 R25.1 R26.1 R27.1 R28.1 | length 10.9
  Top Layer w0.3: C32.1 11.495,44.192 11.499,44.196 ; R25.1 11.499,44.831 11.499,44.196 ; R26.1 11.499,43.503 11.499,44.196
  Bottom Layer w0.3: R28.1 R27.1 C32.1@9.281,44.138
N142901: R19.2 U5.8 | length 1.6
  Top Layer w0.178: R19.2 U5.8
N143087: R18.1 U5.3 | length 1.8
  Top Layer w0.127: R18.1 U5.3
N16674275: L4.2 U3.3 | length 2.6
  Top Layer w0.4: L4.2@34.516,10.48 U3.3
N16674385: C16.1 R23.2 R24.1 U3.5 | length 4
  Top Layer w0.3: C16.1 R23.2 ; U3.5@39.878,12.427 R23.2 ; R24.1 R23.2
N16676719: R21.2 U3.1 | length 1.5
  Top Layer w0.3: U3.1 R21.2
N16679374: R38.2 R39.1 U6.3 | length 3.3
  Top Layer w0.2: R39.1 R38.2 27.93,22.41 U6.3
N16679378: R37.2 R38.1 U6.2 | length 3.4
  Top Layer w0.2: R37.2 R38.1 26.358,23.31 26.704,23.656 U6.2
N16679414: R37.1 U6.1 | length 2.3
  Top Layer w0.2: R37.1 26.22,25.342 26.636,24.926 U6.1
N16679751: TP8.1 U6.5 | length 2.5
  Top Layer w0.2: U6.5 33.542,20.167 TP8.1
N16679782: R40.1 R41.2 R69.1 U6.7 | length 5.6
  Top Layer w0.2: U6.7 R40.1 R69.1
N16679993: TP9.1 U6.6 | length 5.5
  Top Layer w0.2: U6.6 34.995,22.386 36.83,20.551 TP9.1
N16680383: L5.2 U7.2 ZD2.2 | length 6.8
  Top Layer w0.178: L5.2@53.714,33.013 L5.2
  Top Layer w0.6: L5.2@53.714,33.013 ZD2.2 U7.2
N16681208: Q1.1 R40.2 | length 1.5
  Top Layer w0.2: R40.2 Q1.1@40.083,23.656
N16681312: Q1.3 R42.2 U7.5 | length 17.1
  Top Layer w0.2: Q1.3 43.297,22.665 44.127,23.495 R42.2 56.46,25.646 56.558,25.744 U7.5
N16689230: C35.1 R25.2 | length 3.5
  Top Layer w0.3: R25.2 16.163,44.831 16.891,44.103 C35.1
N16689234: C36.1 R26.2 | length 1.3
  Top Layer w0.3: R26.2@14.362,43.503 C36.1
N16689238: C37.1 R27.2 | length 1
  Bottom Layer w0.3: C37.1 R27.2
N16689242: C38.1 R28.2 | length 1
  Bottom Layer w0.3: C38.1 R28.2
N16691279: C27.2 R43.1 R44.1 R45.1 R46.1 | length 14.4
  Bottom Layer w0.3: C27.2 8.001,34.163 ; R43.1 8.001,34.163 ; R44.1 9.271,34.163 ; R45.1 15.621,34.163 ; R46.1 16.891,34.163 15.621,34.163 ; 8.001,34.163 9.271,34.163 ; 9.271,34.163 15.621,34.163
N16693534: R47.1 U8.2 | length 2.5
  Top Layer w0.254: R47.1 U8.2
N16693619: R48.1 U8.3 | length 2.5
  Top Layer w0.254: R48.1 U8.3
N16697582: R50.2 U4.5 | length 3.9
  Top Layer w0.2: v1(67.385,11.464) U4.5
  Bottom Layer w0.2: v1(67.385,11.464) R50.2
N16697934: C42.2 R65.1 R66.2 U4.4 | length 7.9
  Top Layer w0.4: R65.1 65.353,9.94 66.623,9.94 ; 66.115,10.067 U4.4 ; C42.2 66.623,9.94 ; R66.2 67.893,9.94 66.623,9.94
N16699737: C43.2 R67.1 R68.2 U7.4 | length 6.2
  Top Layer w0.178: C43.2 53.282,26.978 53.319,27.014 U7.4
N16700820: Q2.1 R69.2 | length 38.4
  Top Layer w0.2: R69.2 v1(39.243,25.146)
  Mid-Layer 1 w0.2: v1(8.579,26.74) 8.579,29.306 10.896,31.623 19.202,31.623 20.472,30.353 26.543,30.353 31.115,25.781 38.608,25.781 v1(39.243,25.146)
  Bottom Layer w0.2: Q2.1 v1(8.579,26.74)
N16702890: J10.13 R14.2 | length 1.7
  Bottom Layer w0.2: R14.2@31.565,29.464 J10.13
N16702980: J10.11 R11.2 | length 1.7
  Top Layer w0.254: J10.11 R11.2
N16703020: J10.9 R8.2 | length 1.7
  Top Layer w0.254: J10.9 R8.2
N16703024: J10.7 R6.2 | length 1.7
  Top Layer w0.254: J10.7 R6.2
N16703028: J10.5 R1.2 | length 1.7
  Top Layer w0.2: J10.5 R1.2
N16703458: J10.3 R49.1 | length 1.7
  Top Layer w0.2: J10.3 R49.1
N16703705: J10.1 R70.1 | length 1.7
  Top Layer w0.2: J10.1 R70.1
P0_1V: BC1.1 BC2.1 BC8.1 BC9.1 BC10.1 BC11.1 BC12.1 BC13.1 BC14.1 BC15.1 BC16.1 BC17.1 C16.2 L1.1 L4.1 R23.1 TP3.1 U1.6 U1.8 U1.11 U1.22 U1.34 U1.40 | length 45.3
  Top Layer w0.178: v1@12.446,22.81 v1@12.623,22.987 ; v1(12.446,22.987) v1@12.623,22.987 ; U1.6 13.609,22.66 13.282,22.987 v1@12.623,22.987
  Top Layer w0.2: BC11.1 v1(12.446,21.59) 13.355,21.59 13.625,21.86 U1.8 ; BC10.1 v1(12.446,22.987) ; BC13.1 v1(14.859,19.558) ; v1(15.027,25.359) U1.40 ; U1.34 17.872,26.635 v1(18.415,27.178) ; U1.22 v1@20.768,21.46 ; BC17.1 27.432,14.478 TP3.1
  Top Layer w0.3: v1(14.859,19.558) 15.422,20.121 U1.11@15.422,20.361 ; BC2.1 BC1.1 ; L4.1 31.797,16.083 32.414,16.7 38.036,16.7 38.608,16.129 C16.2 R23.1
  Top Layer w0.8: BC16.1@19.935,13.161 22.352,13.161 L4.1
  Top Layer w1: L1.1@21.717,15.737 21.833,15.737 21.833,15.344 22.352,14.825 BC14.1 BC14.1@22.352,13.161
  Bottom Layer w0.2: BC12.1 v1(15.027,25.359) ; BC8.1 v1(18.415,27.178) ; v1(20.768,21.463) BC9.1@20.768,22.477
  other v1: 23.148,16.129 22.352,16.81 23.271,17.145
P0_AUTOLOAD: J10.6 R2.2 U1.23 | length 30.5
  Top Layer w0.127: U1.23 20.359,21.86 20.447,21.948 22.599,21.948 v1(24.511,23.86)
  Top Layer w0.2: J10.6 44.704,28.194 R2.2
  Bottom Layer w0.2: v1(24.511,23.86) 40.37,23.86 J10.6
P0_EN_PHY: J10.10 R9.2 U1.25 | length 25.6
  Top Layer w0.127: U1.25 20.643,22.66 20.701,22.602 22.199,22.602 23.414,23.817 v1(23.414,23.86)
  Top Layer w0.2: J10.10 39.624,28.194 R9.2
  Bottom Layer w0.2: v1(23.414,23.86) 23.414,24.558 23.875,25.019 26.301,25.019 26.701,25.419 36.849,25.419 J10.10
P0_ETH_AN: T1.23 U1.37 | length 7.3
  Top Layer w0.178: U1.37 16.672,26.354 16.513,26.513 16.513,28.436 18.161,30.084 T1.23
P0_ETH_AP: T1.24 U1.36 | length 7.7
  Top Layer w0.178: U1.36 17.072,26.489 16.891,26.67 16.891,28.194 19.431,30.734 T1.24
P0_ETH_BN: T1.19 U1.39 | length 7.7
  Top Layer w0.178: T1.19 13.081,30.246 15.243,28.084 15.243,26.714 15.872,26.085 U1.39
P0_ETH_BP: T1.20 U1.38 | length 7.4
  Top Layer w0.178: T1.20 14.351,29.511 15.621,28.241 15.621,26.871 16.272,26.22 U1.38
P0_ETH_CN: T1.17 U1.2 | length 9.8
  Top Layer w0.178: T1.17 10.541,30.734 13.327,27.948 13.327,27.255 13.327,25.112 14.179,24.26 U1.2
P0_ETH_CP: T1.18 U1.1 | length 8.8
  Top Layer w0.2: T1.18 11.811,30.014 13.716,28.109 13.716,25.273 14.329,24.66 U1.1
P0_ETH_DN: T1.13 U1.4 | length 14.1
  Top Layer w0.2: T1.13 5.461,30.607 8.339,27.729 10.426,27.729 12.56,25.595 12.56,24.794 13.894,23.46 U1.4
P0_ETH_DP: T1.14 U1.3 | length 13
  Top Layer w0.178: T1.14 6.731,29.887 8.5,28.118 10.587,28.118 12.949,25.756 12.949,24.955 14.044,23.86 U1.3
P0_HSIN: C13.2 U1.13 | length 15.8
  Top Layer w0.178: C13.2 7.429,11.389 10.5,11.389 11.894,12.783 13.237,12.783 15.875,15.421 15.875,19.001 16.272,19.398 U1.13
P0_HSIP: C11.2 U1.12 | length 17.3
  Top Layer w0.178: C11.2 5.207,11.303 5.671,11.767 10.311,11.767 11.704,13.161 13.08,13.161 15.494,15.575 15.494,19.154 15.872,19.532 U1.12
P0_HSON: C7.2 U1.9 | length 9.3
  Top Layer w0.178: C7.2 12.319,15.497 12.576,15.24 13.383,15.24 13.666,15.524 13.666,21.156 13.97,21.46 U1.9
P0_HSOP: C9.2 U1.10 | length 11
  Top Layer w0.178: C9.2 10.541,15.621 11.303,14.859 13.536,14.859 14.044,15.367 14.044,20.88 14.224,21.06 U1.10
P0_P3LED1: J10.12 R12.2 U1.26 | length 23
  Top Layer w0.127: U1.26 20.705,23.06 20.836,22.929 22.064,22.929 22.86,23.725 v1(22.86,24.511)
  Top Layer w0.2: J10.12 37.084,28.194 R12.2
  Bottom Layer w0.2: v1(22.86,24.511) 22.86,24.57 23.709,25.419 26.135,25.419 26.535,25.819 34.709,25.819 J10.12
P0_RST: C2.1 Q2.3 R7.2 U1.33 | length 16
  Top Layer w0.2: U1.33 18.272,26.273 18.951,26.952 18.951,27.629 v1(18.415,28.165)
  Bottom Layer w0.2: Q2.3 12.134,28.244 ; C2.1 12.134,28.244 ; v1(18.415,28.165) 13.872,28.165 13.081,28.956 R7.2 12.134,28.244
P0_SCL: R4.2 U1.32 | length 11.4
  Top Layer w0.2: U1.32 18.672,26.107 19.372,26.808 19.372,28.293 v1(19.05,28.615) ; v1@18.922,28.672 v1@19.014,28.579
  Bottom Layer w0.2: R4.2 12.755,30.226 14.366,28.615 v1(19.05,28.615)
P0_SDA: R3.2 U1.31 | length 12.7
  Top Layer w0.2: U1.31 19.072,25.942 19.772,26.642 v1(19.772,29.075)
  Bottom Layer w0.2: R3.2 12.711,31.496 15.142,29.065 v1@19.772,29.065
P0_SMI_ADDR: J10.8 R5.2 U1.24 | length 29.6
  Top Layer w0.127: U1.24 19.786,22.275 22.46,22.275 24.003,23.818 v1(24.003,24.511)
  Top Layer w0.2: J10.8 42.164,28.194 R5.2
  Bottom Layer w0.2: v1(24.003,24.511) 25.527,24.511 25.778,24.26 40.204,24.26 40.894,24.95 J10.8
P0_SMI_SEL: R14.1 R15.1 U1.27 | length 15.1
  Top Layer w0.127: U1.27 20.768,23.46 20.972,23.256 21.748,23.256 v1(22.352,23.86)
  Bottom Layer w0.2: v1(22.352,23.86) 22.41,23.918 22.41,24.697 23.532,25.819 25.969,25.819 26.769,26.619 29.794,26.619 30.538,27.363 R14.1
P0_XTAL_I: C1.1 R16.1 U1.30 Y1.1 | length 8.7
  Top Layer w0.2: U1.30 20.406,24.66 21.063,25.317 R16.1 ; R16.1@21.082,25.781 21.082,29.337 21.547,29.802 Y1.1@22.364,29.802 ; Y1.1@22.412,29.851 C1.1@22.412,31.496
P0_XTAL_O: C3.1 R16.2 U1.29 Y1.3 | length 8.3
  Top Layer w0.2: U1.29 20.831,24.26 21.963,25.392 R16.2 23.334,25.781 23.864,26.311 23.864,27.602 C3.1
POE_LINE_1_2+: C35.2 D2.1 T1.3 | length 5
  Top Layer w0.3: T1.3 v1(16.891,42.037) C35.2
  Bottom Layer w0.3: D2.1 14.858,41.657 15.24,41.275 16.129,41.275 v1(16.891,42.037)
POE_LINE_3_6-: C36.2 D2.2 T1.4 | length 5
  Top Layer w0.3: T1.4 v1(15.621,42.037) C36.2
  Bottom Layer w0.3: D2.2 14.985,44.197 15.621,43.561 v1(15.621,42.037)
POE_LINE_4_5+: C37.2 D3.2 T1.9 | length 4.6
  Top Layer w0.3: T1.9 9.281,40.964 v1(9.281,38.491)
  Bottom Layer w0.3: C37.2 v1(9.281,38.491) 9.289,38.482 D3.2
POE_LINE_7_8-: C38.2 D3.1 T1.10 | length 7.6
  Top Layer w0.3: v1(8.001,38.481) T1.10
  Bottom Layer w0.3: C38.2 v1(8.001,38.481) 8.001,37.846 9.905,35.942 D3.1 ; D3.1@10.87,35.993 D3.1@11.048,35.815
POEST: J10.4 U8.7 | length 22.5
  Top Layer w0.2: U8.7 43.019,43.341 46.482,39.878 46.482,34.29 47.117,33.655 47.117,28.067 J10.4
SFP0_RXN: C13.1 R36.2 U5.4 | length 3.2
  Top Layer w0.127: R36.2 U5.4 ; U5.4@7.005,8.656 C13.1
SFP0_RXP: C11.1 R35.2 U5.5 | length 3.3
  Top Layer w0.127: R35.2 U5.5 C11.1
SFP0_TXN: C7.1 R31.1 R32.2 U5.10 | length 7
  Top Layer w0.127: C7.1 U5.10
  Bottom Layer w0.127: R31.1 R32.2 11.049,21.336 12.319,20.066 U5.10
SFP0_TXP: C9.1 R33.1 R34.2 U5.9 | length 6.2
  Top Layer w0.127: R33.1 R34.2 10.541,20.124 U5.9 C9.1
SFP_3V3AR: BC27.2 BC28.2 FB1.2 R18.2 U5.2 | length 9.7
  Top Layer w0.3: R18.2 9.202,5.9 10.102,6.8 BC27.2 U5.2
  Top Layer w0.6: U5.2 10.541,9.652 11.372,10.483 14.044,10.483 FB1.2
SFP_3V3AT: BC29.2 BC30.2 FB8.2 R31.2 R33.2 U5.6 | length 13.3
  Top Layer w0.3: U5.6@5.207,19.05 5.207,21.844 5.784,22.421 R33.2 v1(7.805,23.31) ; v1@7.747,23.31 v1@7.747,23.368
  Top Layer w0.6: U5.6@5.207,19.05 U5.6 5.207,15.054 FB8.2@5.773,14.488
  Bottom Layer w0.3: v1(7.805,23.31) R31.2
VDD_POE: C39.2 C40.2 C41.1 D2.3 D3.3 D4.1 R47.2 R49.2 U8.1 | length 82.3
  Top Layer w0.4: C39.2 C40.2 29.279,43.122 29.498,43.341 R47.2 30.099,43.399 v1(30.099,44.611) U8.1 ; R49.2 v1(45.974,32.766) ; C41.1 v1(54.991,42.926)
  Top Layer w0.6: v1(64.425,34.544) v1(65.024,33.945) D4.1
  Mid-Layer 1 w0.254: 45.847,44.611 45.974,44.484 v1(45.974,32.766)
  Mid-Layer 1 w0.6: v1(19.177,44.196) 19.592,44.611 v1(30.099,44.611) 45.847,44.611 53.306,44.611 v1(54.991,42.926) 55.1,42.817 56.152,42.817 v1(64.425,34.544) v1(65.024,33.945)
  Bottom Layer w0.4: 18.797,43.688 18.797,44.197 D2.3
  Bottom Layer w0.6: D3.3 18.417,38.482 18.797,38.862 18.797,43.688
VEE_POE: C39.1 C40.1 D2.4 D3.4 R48.2 U8.4 U8.9 | length 26.7
  Top Layer w0.3: v1(21.509,41.656) 22.075,42.222 C40.1 29.279,42.222 29.464,42.037 30.123,42.037 R48.2 30.157,40.859 30.215,40.801 U8.4 34.451,40.801 U8.9
  Bottom Layer w0.3: D3.4 19.043,35.942 20.191,37.09 D2.4 ; D2.4@20.192,41.656 v1(21.509,41.656)
  other v1: 35.687,41.402 36.957,41.402 35.687,42.654 36.957,42.654 35.687,43.907 36.957,43.907
pads on no net: D4.4 J8.1 U8.6 U8.8

## Polygon pours and split planes (outlines as drawn)
GND on Mid-Layer 2 "GND" (solid, remove dead copper, pour order 15): -28.714,67.816 -28.587,67.689 -28.587,-15.242 96.381,-15.242 95.492,-14.353 95.492,67.435
GND on Bottom Layer "GND-BOT" (solid, remove dead copper, pour order 16): -0.998,52.015 -1.33,52.015 -3.324,50.296 -5.816,48.147 -5.816,20.283 -5.816,3.665 -1.662,0.083 0.248,-1.564 79.826,-1.564 79.826,-0.633 82.318,1.516 80.573,3.02 80.573,43.348 80.573,50.009 79.078,51.299
+3.3V on Mid-Layer 1 "mid_33" (solid, remove dead copper, pour order 8): 52.832,14.224 52.832,5.715 51.943,4.826 51.689,5.08 46.482,5.08 45.72,5.08 44.45,6.35 42.291,8.509 14.148,8.509 7.71,8.509 4.916,11.303 4.826,11.393 4.826,15.932 4.826,16.226 9.271,20.671 9.652,21.052 9.652,25.556 9.652,29.464 10.287,30.099 10.668,30.48 17.472,30.48 20.596,30.48 24.638,26.438 25.041,26.035 28.067,26.035 41.91,26.035 42.418,26.543 43.942,28.067 43.942,30.48 43.942,32.869 44.347,33.274 44.855,33.782 48.006,33.782 48.768,33.782 49.53,33.02 50.038,32.512 50.038,27.051 50.038,22.727 51.054,21.711 52.705,20.06 52.705,14.097
P0_1V on Mid-Layer 1 "mid-11" (solid, remove dead copper, pour order 7): 14.926,18.818 13.783,18.818 12.898,18.818 11.962,19.755 11.046,20.671 11.046,21.59 11.046,25.27 11.811,26.035 12.722,26.946 14.351,26.946 14.799,26.946 15.815,25.93 17.339,25.93 17.847,26.438 17.847,28.089 17.909,28.089 18.163,28.343 18.83,28.343 18.925,28.343 20.163,27.105 20.895,26.373 20.895,24.2 20.895,23.377 21.214,23.058 22.662,23.058 24.859,23.058 25.126,22.79 25.656,22.261 25.656,18.412 25.656,14.099 25.019,13.462 24.269,12.712 23.241,12.712 21.057,12.712 20.884,12.885 19.248,14.521 19.248,15.164 19.372,15.164 19.848,15.64 21.095,16.888 21.095,18.756 21.095,20.099 20.748,20.447 18.711,22.484 18.711,22.86 18.711,24.445 18.288,24.868 18.185,24.765 16.623,24.765 15.326,24.765 14.384,23.823 12.935,22.373 12.935,21.717 12.935,21.609 13.335,21.209 13.502,21.042 14.859,21.042 15.68,21.042 15.969,20.753 15.969,19.453 15.947,19.453 15.648,19.155 15.312,18.818 14.926,18.818
AGND on Mid-Layer 1 "mid_gnd" (solid, remove dead copper, pour order 9): 5.715,42.037 4.826,41.148 4.826,40.64 4.826,36.465 6.366,34.925 8.652,32.639 19.708,32.639 42.168,32.639 44.073,34.544 44.699,35.17 44.699,38.989 44.699,40.449 43.746,41.402 43.365,41.783 38.1,41.783 7.165,41.783 6.911,42.037
GND on Top Layer "top_gnd" (solid, remove dead copper, pour order 20): 1.097,51.279 -0.046,51.279 -1.062,50.263 -2.078,49.247 -2.078,9.115 -2.078,-0.918 0.97,-3.966 1.986,-4.982 73.995,-4.982 73.995,-3.712 78.44,0.733 77.297,1.876 77.297,43.786 77.297,49.12 75.138,51.279

## Keep-outs
Keep-Out Layer:
  the board outline again, w0.254

## Other copper
Top Layer:
  region net DC_IN: 62.23,14.316 61.941,14.605 61.18,14.605 60.833,14.258 60.833,12.446 61.214,12.065 62.23,12.065
  region net DC_IN: 59.728,20.955 59.728,17.399 60.109,17.018 60.843,17.018 61.097,17.272 61.097,20.945 60.833,21.209 60.081,21.209 59.938,21.352
  region net +3.3V: 19.771,21.06 19.771,20.725 19.407,20.361 18.672,20.361 18.669,20.358 18.669,20.066 19.431,20.066 20.066,19.431 20.574,19.431 20.828,19.685 20.828,20.193 20.193,20.828 20.193,20.991 20.124,21.06
  region net +3.3V: 50.495,17.145 50.038,16.688 50.038,5.588 50.292,5.334 54.403,5.334 54.404,6.754 52.381,8.579 52.381,13.176 54.62,15.444 52.941,17.145
  region net P0_1V: 22.618,14.593 23.356,14.593 24.257,15.494 24.257,17.209 23.813,17.653 22.699,17.653 21.395,16.349 21.395,15.402 22.157,14.64 22.571,14.64
Mid-Layer 1:
  rectangle net +3.3V: 51.308,5.715 52.381,13.386
  region net VDD_POE: 19.552,44.577 18.93,44.577 18.422,44.069 18.422,43.307 18.425,43.307 18.552,43.18 19.395,43.18 19.756,43.541 19.756,44.373
Mid-Layer 2:
  rectangle net VEE_POE: 30.886,40.259 39.864,45.339
  pour cut-out: 52.508,5.273 52.508,13.716 51.117,13.716 51.117,5.273
Bottom Layer:
  rectangle net VEE_POE: 30.934,40.547 40.132,45.085
  region net DC_IN: 60.198,37.592 59.817,37.211 59.817,32.512 59.563,32.258 56.863,32.258 56.642,32.037 56.642,31.742 56.888,31.496 59.512,31.496 60.071,30.937 60.071,13.081 60.833,12.319 61.849,12.319 62.23,12.7 62.23,14.097 61.214,15.113 61.214,37.211 60.833,37.592
  pour cut-out: 52.44,5.136 52.44,13.716 51.086,13.716 51.086,5.136
  region net VDD_POE: 19.931,44.577 18.922,44.577 18.415,44.07 18.415,43.307 18.542,43.18 19.304,43.18 19.931,43.807

## Silkscreen, mask and mechanical layers (free items; w line width, h text height)
Bottom Overlay:
  text "VCC" at 60.783,38.735 h1
  text "GND" at 64.222,38.735 h1
  text "RESET" at 8.959,29.452 h1
  text "1G" at 36.165,25.299 h1
  text "100M" at 39.018,25.283 h1
  text "FACT" at 41.783,25.256 h1
  text "F1G" at 44.196,25.232 h1
  text "POE" at 46.84,25.146 h1
  text "POW" at 49.63,25.146 h1
  text "ACT" at 34.216,24.926 h1
  text "Engineering Sample V0.90" at 50.14,2.921 h1
  text "Designed By: Hans Kim" at 49.711,1.651 h1